# Allegro board MPRC-V7FPGA_PCBV12_20230526.brd
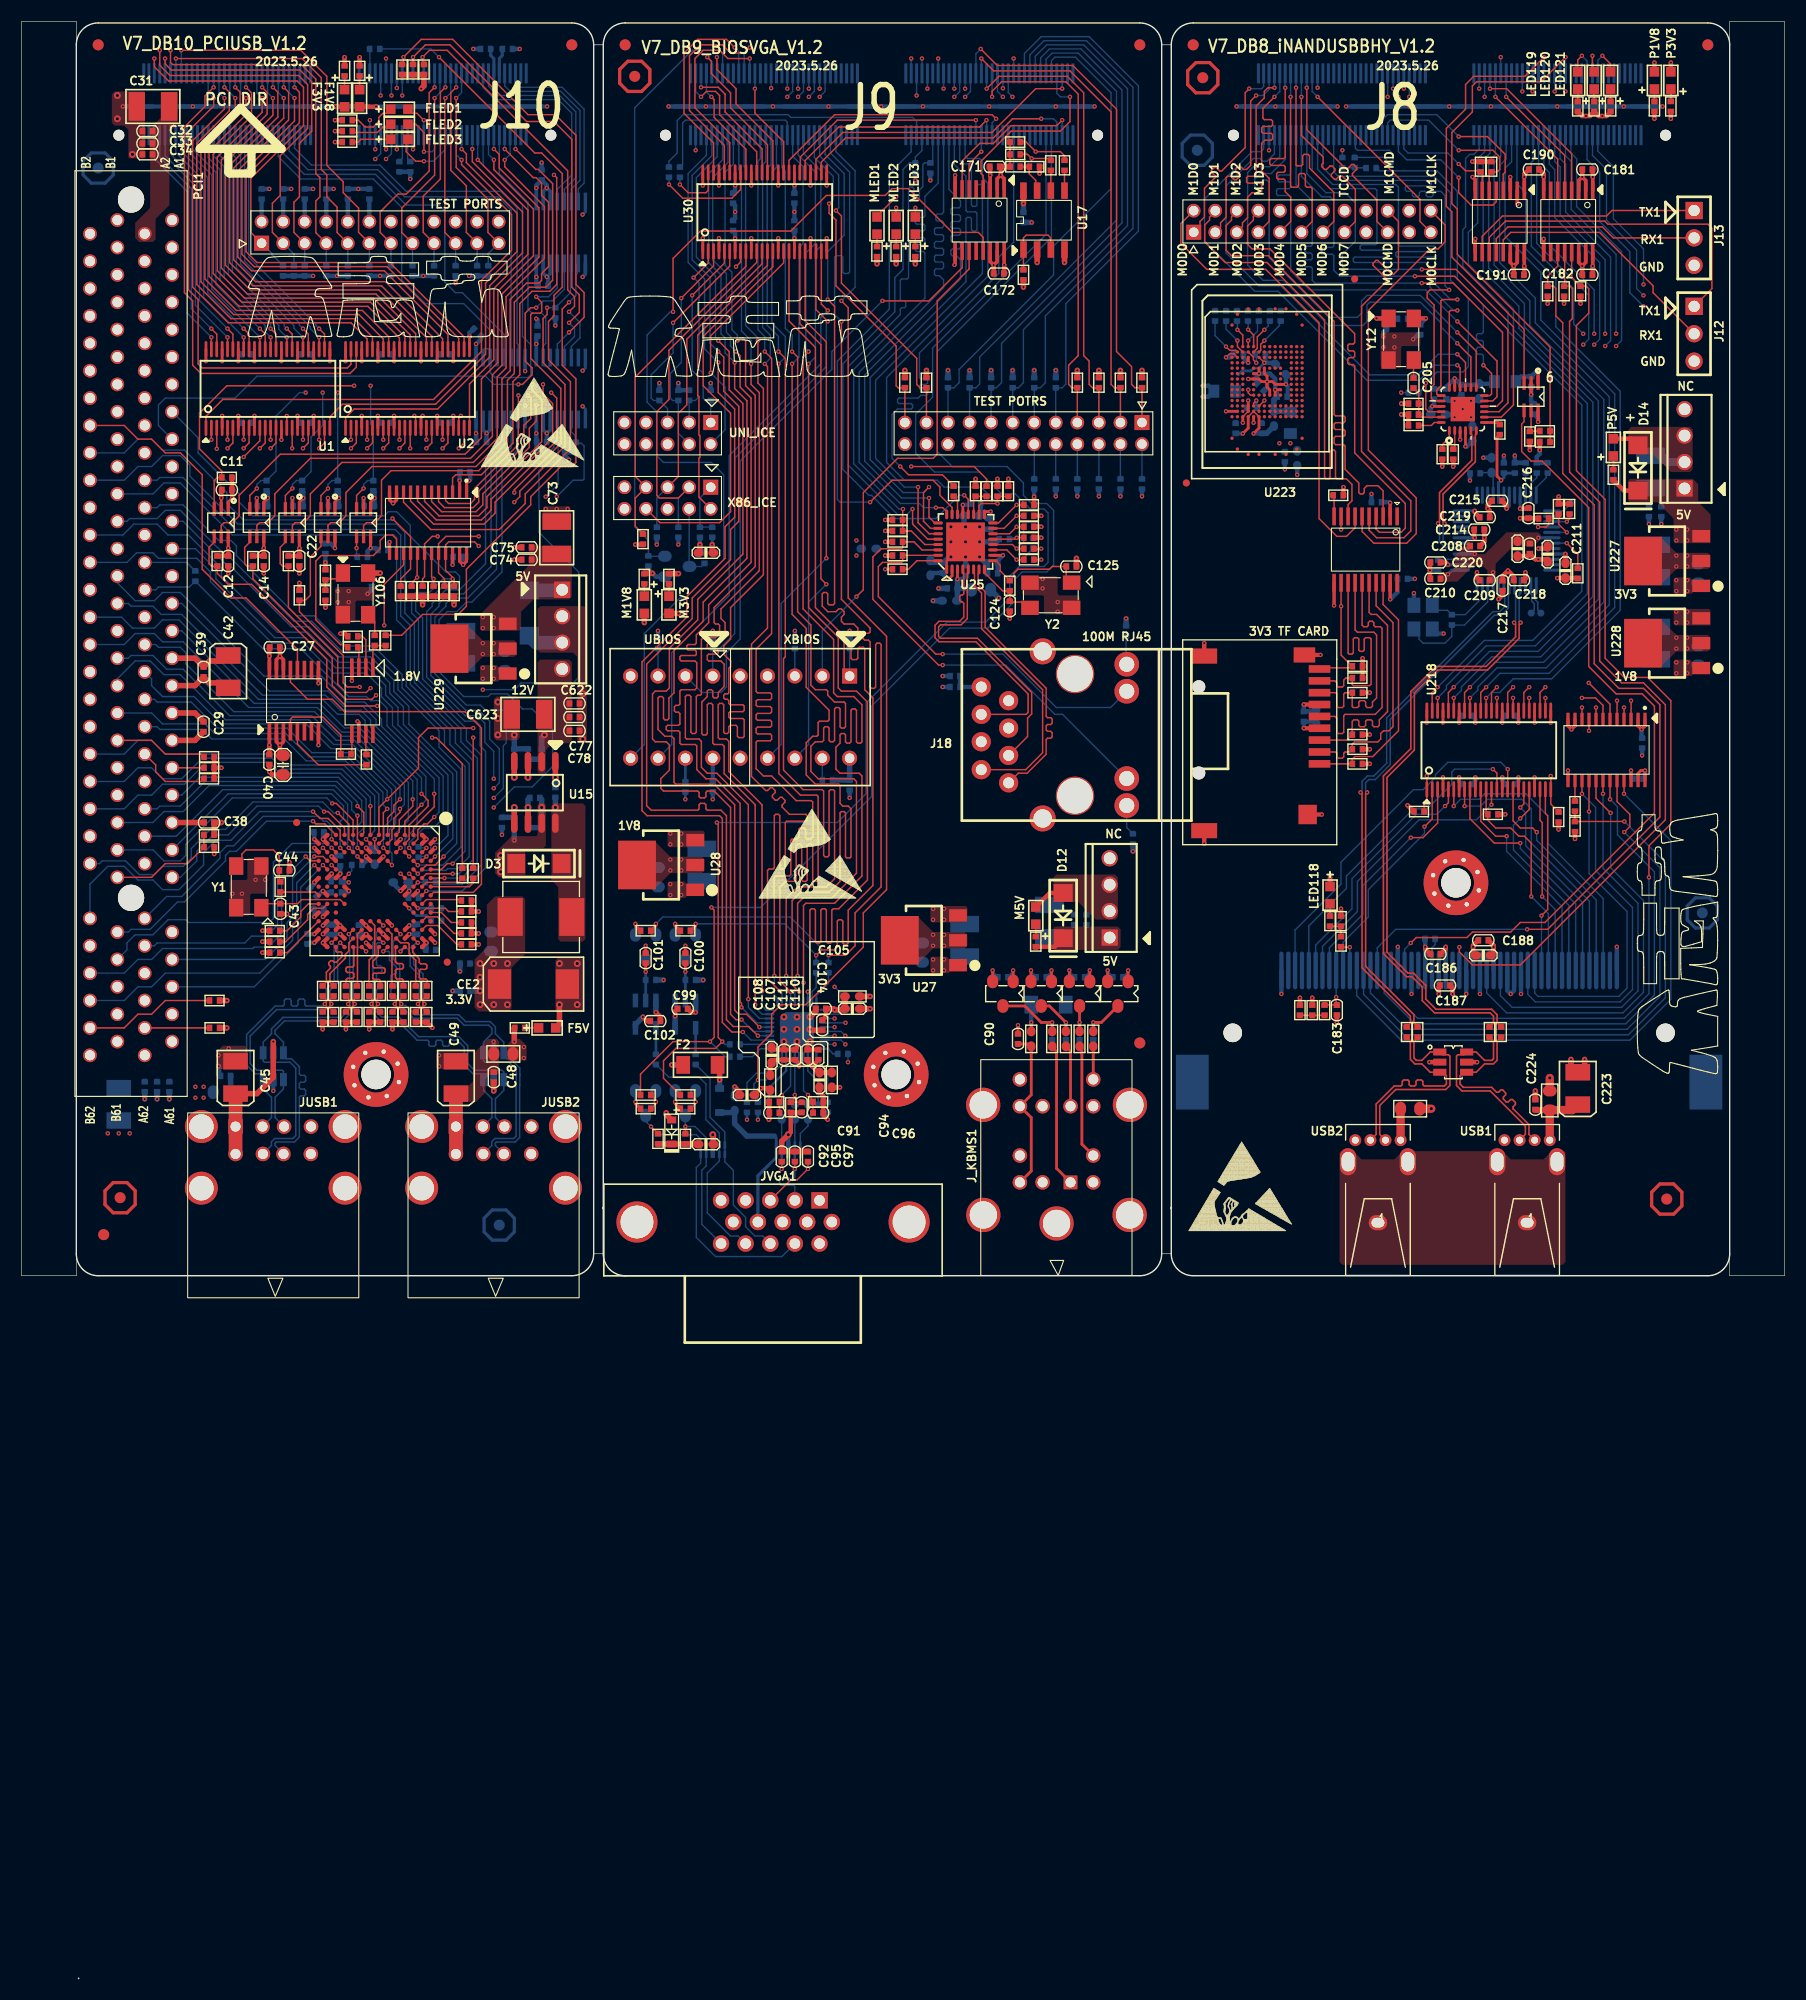
[diagram p0: board, top side]
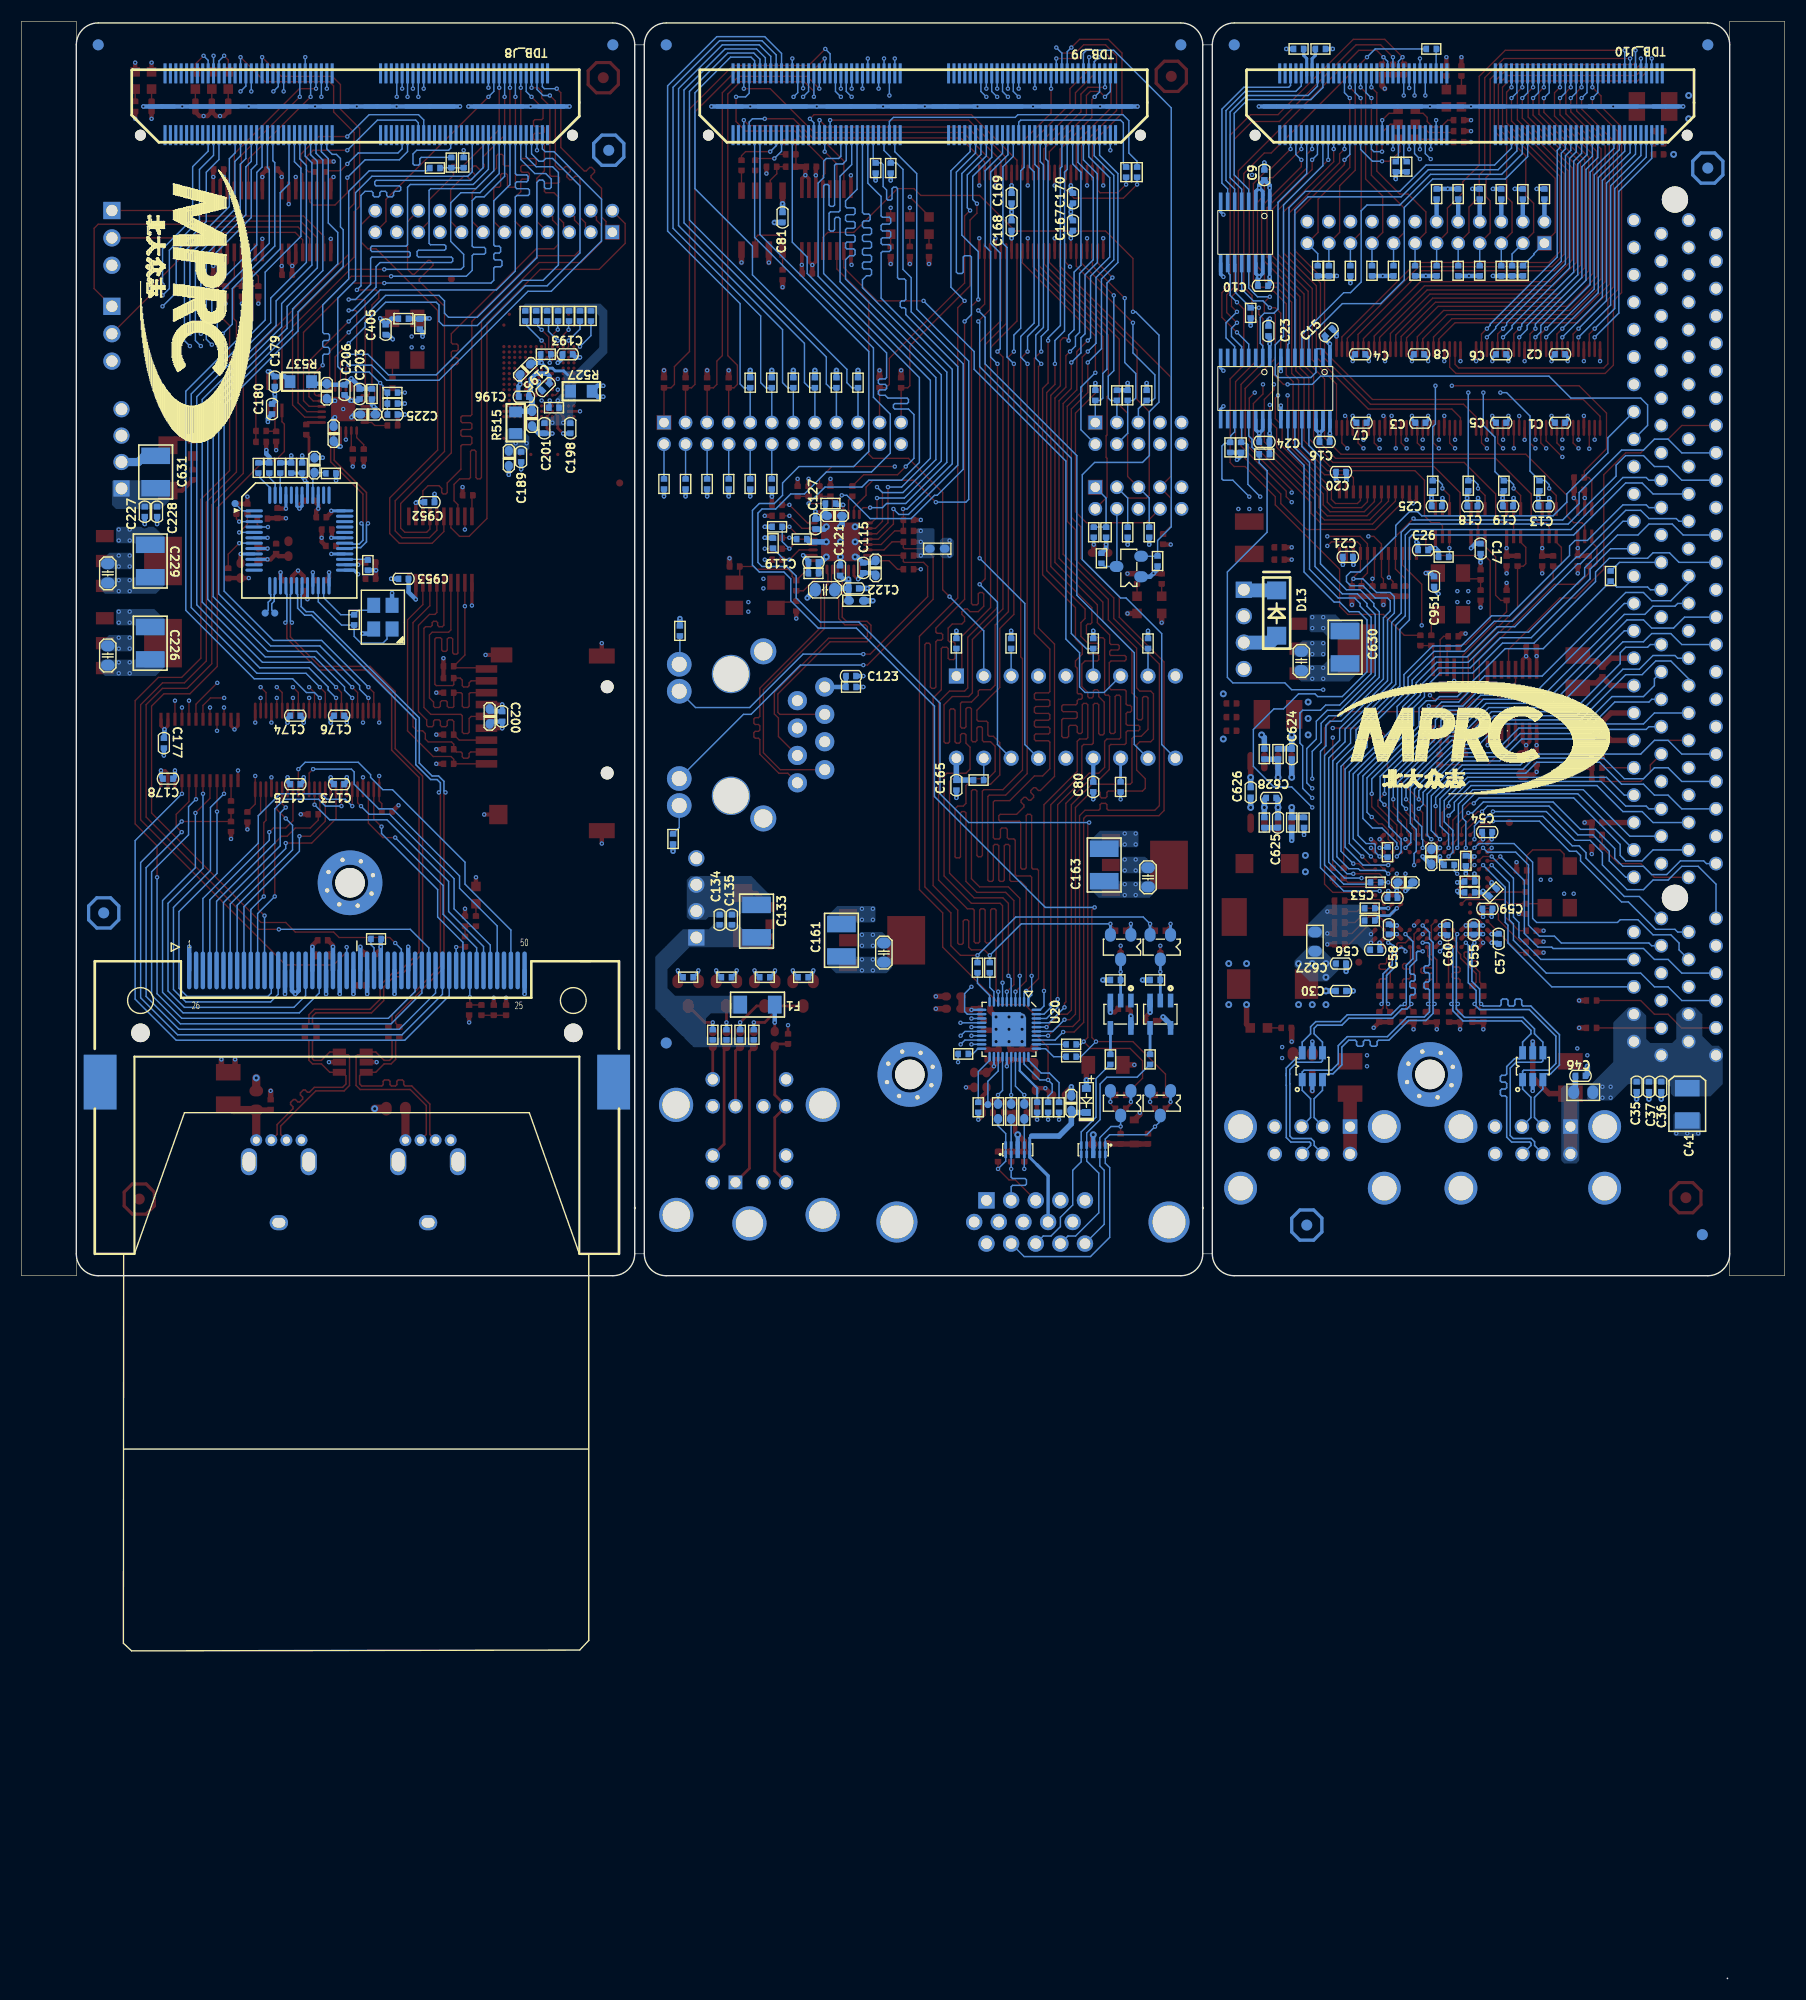
[diagram p1: board, bottom side, seen from below]

Outline 163.58 x 181.51 mm; copper layers: TOP, GND2, ART3, ART4, POWER5, BOTTOM. Coordinates in mm from the lower left corner of the outline.
Outline path: 5.29,0.01 5.29,0 ; 53.09,179.35 arc(52.49,180.79) 51.05,181.39 7.11,181.39 arc(5.68,180.79) 5.08,179.35 5.08,67.21 arc(5.68,65.78) 7.11,65.18 51.05,65.18 arc(52.49,65.78) 53.09,67.21 ; 53.09,179.35 53.09,67.21 ; 53.09,179.35 53.98,179.35 ; 53.09,67.21 53.98,67.21 ; 53.98,179.35 arc(54.57,180.79) 56.01,181.39 103.76,181.39 arc(105.2,180.79) 105.79,179.35 ; 53.98,179.35 53.98,71.4 53.98,71.53 53.98,67.21 ; 53.98,67.21 arc(54.57,65.78) 56.01,65.18 103.76,65.18 arc(105.2,65.78) 105.79,67.21 ; 105.79,179.35 105.79,67.21 ; 105.79,179.35 106.68,179.35 ; 105.79,67.21 106.68,67.21 ; 106.68,179.35 arc(107.28,180.79) 108.71,181.39 156.46,181.39 arc(157.9,180.79) 158.5,179.35 158.5,67.21 arc(157.9,65.78) 156.46,65.18 108.71,65.18 arc(107.28,65.78) 106.68,67.21 ; 106.68,179.35 106.68,71.4 106.68,71.53 106.68,67.21 ; 0,181.51 5.08,181.51 5.08,65.18 0,65.18 0,181.51 ; 158.5,181.51 163.58,181.51 163.58,65.18 158.5,65.18 158.5,181.51

## Design rules (mm)
net group 5VKBCLK: nets 5VKBCLK N125050820
net group 5VMSCLK: nets 5VMSCLK N125050832
net group 5VMSDATA: nets 5VMSDATA N125050826
net group BLUE: nets BLUE CHR_MB
net group BUSBD1: nets BUSBD1+ BUSBD1-
net group BUSBD2: nets BUSBD2+ BUSBD2-
net group BUSBD3: nets BUSBD3+ BUSBD3-
net group BUSBD4: nets BUSBD4+ BUSBD4-
net group BUSBD5: nets BUSBD5+ BUSBD5-
net group CHR_MG: nets CHR_MG GREEN
net group CHR_MR: nets CHR_MR RED
net group DE2CLK: nets DE2CLK N141402505
net group DE2HS: nets DE2HS N141364665
net group DE2VS: nets DE2VS N141364645
net group FE2USBD1-: nets FE2USBD1- USBDN1
net group FE2USBD2+: nets FE2USBD2+ USBDP2
net group FE2USBD2-: nets FE2USBD2- USBDN2
net group MACRXCLKI: nets MACRXCLKI R_RXC
net group MACTXCLKI: nets MACTXCLKI R_TXC
net group RSD1: nets RSDM1 RSDP1
net group RSD2: nets RSDM2 RSDP2
net group RSD3: nets RSDM3 RSDP3
net group RSD4: nets RSDM4 RSDP4
net group RSD5: nets RSDM5 RSDP5
net group USB_D: nets USB_DM USB_DP
net group USBD3: nets USBDN3 USBDP3
net group USBDP1: nets FE2USBD1+ USBDP1
net group DE: nets DE2B0 DE2B1 DE2B2 DE2B3 DE2B4 DE2B5 DE2B6 DE2B7 DE2G0 DE2G1 DE2G2 DE2G3 DE2G4 DE2G5 DE2G6 DE2G7 DE2R0 DE2R1 DE2R2 DE2R3 DE2R4 DE2R5 DE2R6 DE2R7
net group ETH: nets M_RD_N M_RD_P M_TD_N M_TD_P
net group RGMII: nets MACTXD0 MACTXD1 MACTXD2 MACTXD3 MACTXEN
net group USB: nets USBD0 USBD1 USBD2 USBD3 USBD4 USBD5 USBD6 USBD7 USBDIR USBNXT USBSTP
net group USBCLK: nets N73163395 N141462797 N141462849 USBCLK
nets with their own width: min track width 0.203; nets GND

## Placement (name value [footprint] x y rotation side)
C1  0.1uF  [C0402]  20.83 144.3 0 bottom
C2  0.1uF  [C0402]  20.83 150.65 0 bottom
C3  0.1uF  [C0402]  33.78 144.3 0 bottom
C4  0.1uF  [C0402]  39.37 150.65 0 bottom
C5  0.1uF  [C0402]  26.29 144.3 0 bottom
C6  0.1uF  [C0402]  26.29 150.65 0 bottom
C7  0.1uF  [C0402]  39.24 144.3 0 bottom
C8  0.1uF  [C0402]  33.91 150.65 0 bottom
C9  0.1uF  [C0402]  48.26 167.29 90 bottom
C10  0.1uF  [C0402]  48.39 157 0 bottom
C11  0.1uF  [C0402]  19.05 138.08 0 top
C12  0.1uF  [C0402]  19.18 131.48 270 top
C13  0.1uF  [C0402]  22.35 136.56 0 bottom
C14  0.1uF  [C0402]  22.48 131.48 270 top
C15  0.1uF  [C0402]  42.29 152.68 135 bottom
C16  0.1uF  [C0402]  42.67 142.52 0 bottom
C17  0.1uF  [C0402]  28.19 132.62 270 bottom
C18  0.1uF  [C0402]  28.96 136.56 0 bottom
C19  0.1uF  [C0402]  25.65 136.56 0 bottom
C20  0.1uF  [C0402]  41.15 139.73 180 bottom
C21  0.1uF  [C0402]  40.51 131.86 180 bottom
C22  0.1uF  [C0402]  25.78 131.48 270 top
C23  0.1uF  [C0402]  47.88 152.81 90 bottom
C24  0.1uF  [C0402]  48.26 142.52 0 bottom
C25  0.1uF  [C0402]  32.26 136.56 0 bottom
C26  0.1uF  [C0402]  33.53 132.49 0 bottom
C27  0.1uF  [C0402]  23.5 123.47 0 top
C28  22uF/6.3V  [C0805]  24.26 112.55 270 top
C29  0.1uF  [C0402]  16.89 116.11 90 top
C30  0.1uF  [C0402]  41.15 91.6 180 bottom
C31  22uF/25V  [1210-A]  12.19 173.64 180 top
C32  0.1uF  [C0402]  11.68 171.35 180 top
C33  0.1uF  [C0402]  11.68 170.21 180 top
C34  0.1uF  [C0402]  11.68 169.19 180 top
C35  0.1uF  [C0402]  13.72 82.71 270 bottom
C36  0.1uF  [C0402]  11.43 82.71 270 bottom
C37  0.1uF  [C0402]  12.57 82.71 270 bottom
C38  0.1uF  [C0402]  17.4 107.22 0 top
C39  0.1uF  [C0402]  16.89 121.19 270 top
C40  0.1uF  [C0402]  22.99 113.06 270 top
C41  100uF/10V  [BCAP]  9.02 82.58 270 bottom
C42  100uF/10V  [BCAP]  19.18 122.71 270 top
C43  22pF  [C0402]  24 99.22 270 top
C44  22pF  [C0402]  24.38 102.77 0 top
C45  100uF/10V  [BCAP]  19.86 82.07 90 top
C46  470pF  [C0402]  18.92 83.72 180 bottom
C48  470pF  [C0402]  43.82 83.6 270 top
C49  100uF/10V  [BCAP]  40.3 82.07 90 top
C51  10uF/6.3V  [C0603]  32.77 104.04 270 bottom
C52  4.7uF/6.3V  [C0603]  35.18 101.67 0 bottom
C53  0.1uF  [C0402]  36.37 100.23 180 bottom
C54  0.1uF  [C0402]  27.58 106.33 0 bottom
C55  0.1uF  [C0402]  28.83 97.29 90 bottom
C56  0.01uF  [C0402]  37.97 95.41 180 bottom
C57  0.1uF  [C0402]  26.52 96.42 270 bottom
C58  0.1uF  [C0402]  36.7 97.31 90 bottom
C59  0.1uF  [C0402]  27.56 99.22 180 bottom
C60  0.01uF  [C0402]  31.29 97.24 90 bottom
C73  22uF/25V  [1210-A]  49.66 133.63 270 top
C74  0.1uF  [C0402]  46.86 131.6 180 top
C75  0.1uF  [C0402]  46.86 132.75 180 top
C77  0.1uF  [C0402]  51.31 117 0 top
C78  0.1uF  [C0402]  51.31 115.73 0 top
C80  0.1uF  [C0402]  64.14 110.52 270 bottom
C81  0.1uF  [C0402]  92.96 163.35 90 bottom
C86  1uF/10V  [C0603]  63.5 132.24 0 top
C89  1uF/10V  [C0603]  67.31 81.95 180 top
C90  0.1uF  [C0402]  92.46 87.15 90 top
C91  10pF  [C0402]  69.85 80.29 180 top
C92  10pF  [C0402]  70.53 76.23 90 top
C93  1uF/10V  [C0603]  66.17 81.18 90 bottom
C94  10pF  [C0402]  72.39 80.8 270 top
C95  10pF  [C0402]  71.75 76.23 90 top
C96  10pF  [C0402]  73.91 80.29 0 top
C97  10pF  [C0402]  72.97 76.23 90 top
C98  10uF/6.3V  [C0603]  63.5 77.37 0 top
C99  0.1uF  [C0402]  61.34 89.95 180 top
C100  22pF  [C0402]  61.6 94.65 90 top
C101  22pF  [C0402]  57.91 94.65 90 top
C102  0.1uF  [C0402]  58.8 88.8 180 top
C103  10uF/6.3V  [C0603]  77.09 89.95 0 top
C104  0.1uF  [C0402]  74.3 88.42 270 top
C105  0.01uF  [C0402]  74.17 89.95 180 top
C106  10uF/6.3V  [C0603]  69.6 85.63 90 top
C107  0.1uF  [C0402]  71.78 85.68 90 top
C108  0.01uF  [C0402]  70.76 85.68 90 top
C109  10uF/6.3V  [C0603]  74.04 83.34 270 top
C110  0.1uF  [C0402]  73.94 85.68 90 top
C111  0.01uF  [C0402]  72.92 85.68 90 top
C114  4.7uF/6.3V  [C0603]  84.33 130.84 90 bottom
C115  0.1uF  [C0402]  85.47 130.84 90 bottom
C119  X_100pF  [C0402]  90.09 131.35 0 bottom
C120  22uF/6.3V  [C0805]  89.03 128.81 0 bottom
C121  0.1uF  [C0402]  87.63 130.59 270 bottom
C122  0.1uF  [C0402]  86.36 128.94 0 bottom
C123  0.1uF  [C0402]  86.61 120.81 180 bottom
C124  22pF  [C0402]  91.69 127.28 270 top
C125  22pF  [C0402]  97.41 130.97 0 top
C126  10uF/6.3V  [C0603]  88.14 135.67 0 bottom
C127  0.1uF  [C0402]  89.92 134.9 90 bottom
C133  22uF/25V  [1210-A]  95.38 98.07 270 bottom
C134  0.1uF  [C0402]  98.81 98.2 90 bottom
C135  0.1uF  [C0402]  97.66 98.2 90 bottom
C161  22uF/25V  [1210-A]  87.5 96.3 90 bottom
C162  22uF/6.3V  [C0805]  83.57 95.15 90 bottom
C163  22uF/25V  [1210-A]  63.12 103.28 90 bottom
C164  22uF/6.3V  [C0805]  59.05 102.14 90 bottom
C165  0.1uF  [C0402]  76.84 110.68 270 bottom
C167  0.1uF  [C0402]  66.02 162.59 90 bottom
C168  0.1uF  [C0402]  71.71 162.59 90 bottom
C169  0.1uF  [C0402]  71.71 165.13 270 bottom
C170  0.1uF  [C0402]  66.02 165.13 270 bottom
C171  0.1uF  [C0402]  90.3 168.05 180 top
C172  0.1uF  [C0402]  90.68 158.15 180 top
C173  0.1uF  [C0402]  134.11 110.77 0 bottom
C174  0.1uF  [C0402]  138.18 117.12 180 bottom
C175  0.1uF  [C0402]  138.18 110.77 180 bottom
C176  0.1uF  [C0402]  134.11 117.12 0 bottom
C177  0.1uF  [C0402]  150.37 114.58 270 bottom
C178  0.1uF  [C0402]  149.99 111.28 180 bottom
C179  0.1uF  [C0402]  140.08 148.11 90 bottom
C180  0.1uF  [C0402]  140.34 145.57 90 bottom
C181  0.1uF  [C0402]  145.29 167.8 180 top
C182  0.1uF  [C0402]  145.29 158.02 180 top
C183  X_0.047uF  [C0402]  122.05 89.82 90 top
C184  10uF/6.3V  [C0603]  135.64 94.9 0 top
C185  4.7uF/6.3V  [C0603]  118.36 141 270 bottom
C186  0.1uF  [C0402]  131.19 95.03 180 top
C187  0.1uF  [C0402]  132.08 92.11 180 top
C188  0.1uF  [C0402]  135.64 96.3 0 top
C189  0.01uF  [C0402]  117.22 141.13 270 bottom
C190  0.1uF  [C0402]  140.34 167.8 0 top
C191  0.1uF  [C0402]  138.94 158.02 180 top
C193  0.1uF  [C0402]  112.9 150.65 180 bottom
C194  10uF/6.3V  [C0603]  116.2 144.68 270 bottom
C195  0.1uF  [C0402]  114.94 147.6 135 bottom
C196  0.01uF  [C0402]  116.97 146.72 180 bottom
C197  10uF/6.3V  [C0603]  116.84 149.26 315 bottom
C198  0.1uF  [C0402]  112.65 143.79 90 bottom
C199  10uF/6.3V  [C0603]  120.14 117.06 90 bottom
C200  0.1uF  [C0402]  118.98 117.06 270 bottom
C201  0.01uF  [C0402]  115.06 143.79 90 bottom
C202  2.2uF/6.3V  [C0603]  131.44 145.06 180 bottom
C203  0.1uF  [C0402]  132.21 146.97 90 bottom
C204  2.2uF/6.3V  [C0603]  134.62 143.29 90 bottom
C205  0.1uF  [C0402]  129.16 147.99 270 top
C206  0.1uF  [C0402]  133.6 147.35 270 bottom
C207  10uF/6.3V  [C0603]  135.25 147.22 270 bottom
C208  0.1uF  [C0402]  134.87 132.87 0 top
C209  0.1uF  [C0402]  135.76 129.7 180 top
C210  0.1uF  [C0402]  131.19 129.82 180 top
C211  0.1uF  [C0402]  139.95 132.62 270 top
C212  1uF/10V  [C0603]  141.6 132.11 270 top
C213  10uF/6.3V  [C0603]  138.81 132.62 270 top
C214  0.1uF  [C0402]  135.25 134.4 0 top
C215  0.1uF  [C0402]  136.91 137.06 180 top
C216  0.1uF  [C0402]  139.83 135.92 270 top
C217  0.1uF  [C0402]  137.41 129.19 90 top
C218  0.1uF  [C0402]  138.94 129.7 180 top
C219  0.1uF  [C0402]  135.76 135.54 0 top
C220  0.1uF  [C0402]  131.19 131.35 180 top
C221  10uF/6.3V  [C0603]  143.26 130.59 270 top
C222  1uF/10V  [C0603]  136.4 140.37 90 bottom
C223  100uF/10V  [BCAP]  144.4 81.06 90 top
C224  470pF  [C0402]  140.46 81.06 90 top
C225  0.1uF  [C0402]  129.16 145.06 180 bottom
C226  22uF/25V  [1210-A]  151.64 123.86 90 bottom
C227  0.1uF  [C0402]  152.15 136.05 270 bottom
C228  0.1uF  [C0402]  151 136.05 270 bottom
C229  22uF/25V  [1210-A]  151.64 131.48 90 bottom
C230  22uF/6.3V  [C0805]  155.58 130.33 90 bottom
C232  22uF/6.3V  [C0805]  155.58 122.71 90 bottom
C405  0.1uF  [C0402]  129.79 152.94 270 bottom
C622  0.1uF  [C0402]  51.31 118.27 180 top
C623  22uF/25V  [1210-A]  46.99 117.25 180 top
C624  0.1uF  [C0402]  45.72 113.57 270 bottom
C625  1nF  [C0402]  46.99 107.22 270 bottom
C626  0.1uF  [C0402]  49.53 110.01 270 bottom
C627  0.1uF  [C0402]  41.15 94.14 180 bottom
C628  22pF  [C0402]  47.62 109.5 0 bottom
C629  22uF/6.3V  [C0805]  44.83 122.2 90 bottom
C630  22uF/25V  [1210-A]  40.77 123.47 270 bottom
C631  22uF/25V  [1210-A]  151.13 139.73 270 bottom
C951  0.1uF  [C0402]  32.51 129.57 270 bottom
C952  0.1uF  [C0402]  125.73 136.94 180 bottom
C953  0.1uF  [C0402]  128.14 129.82 0 bottom
CE2  330uF/6.3V  [DCAP]  47.5 92.23 180 top
CF1  CF Short-arm  [CFCMD_7E50_3M]  132.46 93.5 180 bottom
D3  B340A-SMA  [SMA]  48.01 103.41 0 top
D4  IN5819  [D67X49H50]  64.77 81.44 270 bottom
D5  IN5819  [D67X49H50]  60.33 78.52 270 top
D12  SMAJ5.0A  [SMA]  96.65 98.58 270 top
D13  SMAJ5.0A  [SMA]  47.12 126.65 90 bottom
D14  SMAJ5.0A  [SMA]  149.99 140.11 270 top
F1  1.5A/6V  [1206-A]  95.29 90.33 0 bottom
F1V8  GREEN  [LED0603]  31.37 174.4 270 top
F2  1.5A/6V  [1206-A]  62.99 84.74 0 top
F3V3  GREEN  [LED0603]  29.97 174.4 270 top
F5V  GREEN  [LED0603]  48.77 88.17 0 top
FB1  220 Ohm@100MHz  [L0805]  18.67 82.2 0 bottom
FB2  220 Ohm@100MHz  [L0805]  44.7 85.76 180 top
FB3  220 Ohm@100MHz  [L0805]  43.56 96.17 90 bottom
FB4  220 Ohm@100MHz  [L0603]  93.69 87.15 270 top
FB5  220 Ohm@100MHz  [L0603]  95.63 87.15 270 top
FB6  220 Ohm@100MHz  [L0603]  98.17 87.15 270 top
FB7  220 Ohm@100MHz  [L0603]  96.9 87.15 270 top
FB8  220 Ohm@100MHz  [L0603]  99.44 87.15 270 top
FB9  75 Ohm@100MHz  [L0603]  70.53 80.42 270 bottom
FB10  75 Ohm@100MHz  [L0603]  71.75 80.42 270 bottom
FB11  75 Ohm@100MHz  [L0603]  72.97 80.42 270 bottom
FB12  220 Ohm@100MHz  [L0603]  77.09 91.09 0 top
FB13  220 Ohm@100MHz  [L0603]  69.47 83.09 270 top
FB14  220 Ohm@100MHz  [L0603]  75.18 83.34 270 top
FB15  220 Ohm@100MHz  [L0603]  86.11 127.79 0 bottom
FB16  220 Ohm@100MHz  [L0603]  78.61 132.62 0 bottom
FB32  220 Ohm@100MHz  [L0805]  128.85 80.68 180 top
FB33  220 Ohm@100MHz  [L0805]  141.8 81.44 270 top
FLED1  GREEN  [LED0603]  35.05 173.39 0 top
FLED2  GREEN  [LED0603]  35.05 171.99 0 top
FLED3  GREEN  [LED0603]  35.05 170.59 0 top
H1  -  [TLC240D108]  81.15 83.85 0 top
H2  -  [TLC240D108]  32.89 83.85 0 top
H3  -  [TLC240D108]  133.1 101.63 0 top
J1  CN HEADER 4X1 PC POWER  [SIP4_2N45]  50.17 128.81 0 top
J5  CH 12X2 P2.0mm  [2X12_P2MM]  33.27 161.96 90 top
J6  SPI FLASH SOCKET  [DIP_FLASH_NARROWSOCKET]  66.67 117 270 top
J7  CN HEADER 5X2 P2.0mm  [2X5_2MM]  59.94 143.32 270 top
J8  CN HEADER 5X2 P2.0mm  [2X5_2MM]  59.94 137.32 270 top
J9  CH 12X2 P2.0mm  [2X12_P2MM]  92.96 143.32 270 top
J11  CN HEADER 4X1 PC POWER  [SIP4_2N45]  100.97 96.55 180 top
J12  CN HEADER 3X1 P2.5mm  [J1X3L100P]  155.19 155.1 270 top
J13  CN HEADER 3X1 P2.5mm  [J1X3L100P]  155.19 163.99 270 top
J14  TF CARD  [TFCARD]  122.14 124.16 270 top
J15  CN HEADER 4X1 PC POWER  [SIP4_2N45]  154.31 138.21 180 top
J16  CH 12X2 P2.0mm  [2X12_P2MM]  119.76 162.97 90 top
J18  HR911105A  [RJ45_HR911105A]  87.25 115.35 90 top
J_KBMS1  KBMS 17P  [PS2_X]  97.33 73.84 270 top
JUSB1  USBAFDRD-SQBL5N0/DIP-8P  [USB]  19.86 79.02 90 top
JUSB2  USBAFDRD-SQBL5N0/DIP-8P  [USB]  40.3 79.02 90 top
JVGA1  DB15  [VGA_S]  74.04 72.17 180 top
L2  4.7uH/7066  [SML2525]  51.05 98.46 270 top
LED118  GREEN  [LED0603]  121.41 100.49 270 top
LED119  GREEN  [LED0603]  144.4 176.05 90 top
LED120  GREEN  [LED0603]  145.92 176.05 90 top
LED121  GREEN  [LED0603]  147.45 176.05 90 top
M1V8  GREEN  [LED0603]  57.79 127.41 270 top
M3V3  GREEN  [LED0603]  60.07 127.41 270 top
M5V  GREEN  [LED0603]  94.11 98.58 90 top
M7  MARK  [SMTMARK]  51.05 179.35 180 bottom
M8  MARK  [SMTMARK]  51.05 179.35 0 top
M9  MARK  [SMTMARK]  56.01 179.35 180 bottom
M10  MARK  [SMTMARK]  7.11 179.35 180 bottom
M11  MARK  [SMTMARK]  56.01 179.35 0 top
M12  MARK  [SMTMARK]  7.11 179.35 0 top
M13  MARK  [SMTMARK]  103.76 179.35 0 top
M14  MARK  [SMTMARK]  9.14 72.42 0 top
M15  MARK  [SMTMARK]  103.76 179.35 180 bottom
M16  MARK  [SMTMARK]  7.11 167.92 180 bottom
M17  MARK  [SMTMARK]  56.9 176.43 0 top
M18  MARK  [SMTMARK]  44.32 69.88 180 bottom
M*  MARK  [unnamed]  103.76 86.77 0 top
MLED1  GREEN  [LED0603]  79.38 162.59 90 top
MLED2  GREEN  [LED0603]  81.15 162.59 90 top
MLED3  GREEN  [LED0603]  82.93 162.59 90 top
MS1  FMARK  [TESTPAD_C26]  25.53 107.22 0 top
MS2  FMARK  [TESTPAD_C26]  39.5 94.26 0 top
MS3  FMARK  [TESTPAD_C26]  123.7 157.64 0 top
MS4  FMARK  [TESTPAD_C26]  108.08 138.71 0 top
NOREF  -  [unnamed]  7.62 68.99 0 top
NOREF#2  -  [#2]  5.08 65.18 0 top
NOREF#3  MARK  [unnamed]  156.46 179.35 0 top
NOREF#4  MARK  [unnamed]  108.71 179.35 0 top
NOREF#5  #VAL  [#2]  199.14 89.31 0 top
NOREF#6  MARK  [unnamed]  109.6 176.31 0 top
NOREF#7  MARK  [unnamed]  152.65 72.29 0 top
NOREF#8  #VAL  [#2]  30.35 114.97 180 bottom
NOREF#9  MARK  [unnamed]  155.96 98.84 180 bottom
NOREF#10  MARK  [unnamed]  156.46 179.35 180 bottom
NOREF#11  #VAL  [#2]  147.45 156.62 270 bottom
NOREF#12  -  [unnamed]  7.62 68.99 180 bottom
NOREF#13  MARK  [unnamed]  109.09 169.58 180 bottom
NOREF#14  MARK  [unnamed]  103.76 86.77 180 bottom
NOREF#15  MARK  [unnamed]  108.71 179.35 180 bottom
P1V8  GREEN  [LED0603]  151.51 176.05 90 top
P3V3  GREEN  [LED0603]  153.03 176.05 90 top
P5V  GREEN  [LED0603]  147.7 142.02 90 top
PCI1  PCI-32AB_1  [PCI_AB]  13.97 163.1 270 top
Q1  SN74AVC1T45DCK-SC70  [DCK_6P]  19.18 136.3 270 top
Q2  SN74AVC1T45DCK-SC70  [DCK_6P]  22.48 136.3 270 top
Q3  SN74AVC1T45DCK-SC70  [DCK_6P]  29.08 136.3 270 top
Q4  SN74AVC1T45DCK-SC70  [DCK_6P]  25.78 136.3 270 top
Q5  SN74AVC1T45DCK-SC70  [DCK_6P]  32.38 136.3 270 top
Q7  BSS138LT1G  [SOT23_GSD]  101.73 91.34 270 top
Q8  BSS138LT1G  [SOT23_GSD]  98.17 91.34 270 top
Q9  BSS138LT1G  [SOT23_GSD]  94.62 91.34 270 top
Q10  BSS138LT1G  [SOT23_GSD]  91.06 91.34 270 top
Q11  BSS138LT1G  [SOT23_GSD]  61.6 95.66 270 bottom
Q12  BSS138LT1G  [SOT23_GSD]  61.6 81.18 270 bottom
Q13  BSS138LT1G  [SOT23_GSD]  57.91 81.18 270 bottom
Q14  BSS138LT1G  [SOT23_GSD]  57.91 95.66 270 bottom
Q15  BSS138LT1G  [SOT23_GSD]  60.83 130.97 0 bottom
Q16  SN74AVC1T45DCK-SC70  [DCK_6P]  140.72 147.99 270 top
R1  4.7K  [R0402]  18.16 131.48 270 top
R2  4.7K  [R0402]  21.46 131.48 270 top
R3  4.7K  [R0402]  48.26 141.38 0 bottom
R4  4.7K  [R0402]  25.78 128.3 270 top
R5  4.7K  [R0402]  51.44 142.02 90 bottom
R6  4.7K  [R0402]  24.77 131.48 270 top
R7  4.7K  [R0402]  31.62 131.86 180 bottom
R8  4.7K  [R0402]  50.42 142.02 90 bottom
R9  4.7K  [R0402]  36.2 128.68 90 top
R10  4.7K  [R0402]  35.18 128.68 90 top
R11  4.7K  [R0402]  40.13 128.68 90 top
R12  4.7K  [R0402]  39.24 128.68 90 top
R13  4.7K  [R0402]  38.23 128.68 90 top
R14  4.7K  [R0402]  37.21 128.68 90 top
R15  4.7K  [R0402]  49.53 154.49 90 bottom
R16  33  [R0402]  32.77 124.11 270 top
R17  10K  [R0402]  30.73 124.49 0 top
R18  33  [R0402]  32 113.06 270 top
R19  33  [R0402]  30.73 123.47 0 top
R20  33  [R0402]  30.1 113.57 0 top
R21  33  [R0402]  16.13 130.08 90 bottom
R22  10K  [R0402]  17.91 90.71 0 top
R23  10K  [R0402]  17.91 88.17 0 top
R24  10K  [R0402]  17.4 113.31 0 top
R25  10K  [R0402]  17.4 112.3 0 top
R26  10K  [R0402]  17.4 111.28 0 top
R27  X_10K  [R0402]  17.4 104.93 0 top
R28  10K  [R0402]  17.4 106.08 0 top
R29  10K  [R0402]  41.28 95.92 0 top
R30  10K  [R0402]  41.28 96.93 0 top
R31  10K  [R0402]  41.28 98.96 0 top
R32  10K  [R0402]  41.28 97.95 0 top
R33  10K  [R0402]  41.28 99.98 0 top
R34  9.1K  [R0402]  23.5 95.15 0 top
R35  1.5K  [R0402]  23.5 96.17 0 top
R36  1.5K  [R0402]  23.5 97.19 0 top
R37  1.5K  [R0402]  38.48 99.27 0 bottom
R38  4.7K  [R0402]  38.48 98.13 0 bottom
R39  1.5K  [R0402]  29.21 100.74 0 bottom
R40  0  [R0402]  37.94 101.67 180 bottom
R41  0  [R0402]  40.89 102.52 270 top
R42  0  [R0402]  41.91 102.52 270 top
R43  4.7K  [R0402]  31.11 103.28 180 bottom
R44  36 1%  [R0402]  24 101.25 270 top
R45  1.5K  [R0402]  29.57 103.67 270 bottom
R46  1.5K  [R0402]  27.05 100.74 135 bottom
R47  1.5K  [R0402]  29.21 101.76 180 bottom
R48  33  [R0402]  36.83 104.48 90 bottom
R49  36 1%  [R0402]  28.96 91.6 90 top
R50  15K  [R0402]  28.96 89.18 90 top
R51  36 1%  [R0402]  27.94 91.6 90 top
R52  15K  [R0402]  27.94 89.18 90 top
R53  36 1%  [R0402]  31.11 91.6 90 top
R54  15K  [R0402]  31.11 89.18 90 top
R55  36 1%  [R0402]  30.1 91.6 90 top
R56  15K  [R0402]  30.1 89.18 90 top
R57  36 1%  [R0402]  33.27 91.6 90 top
R58  15K  [R0402]  33.27 89.18 90 top
R59  36 1%  [R0402]  32.26 91.6 90 top
R60  15K  [R0402]  32.26 89.18 90 top
R61  36 1%  [R0402]  35.43 91.6 90 top
R62  15K  [R0402]  35.43 89.18 90 top
R63  36 1%  [R0402]  34.42 91.6 90 top
R64  15K  [R0402]  34.42 89.18 90 top
R65  36 1%  [R0402]  37.59 91.6 90 top
R66  15K  [R0402]  37.59 89.18 90 top
R67  36 1%  [R0402]  36.58 91.6 90 top
R68  15K  [R0402]  36.58 89.18 90 top
R69  33  [R0402]  32.77 178.97 180 bottom
R70  4.7K  [R0402]  35.05 168.05 90 bottom
R71  4.7K  [R0402]  36.07 168.05 90 bottom
R72  4.7K  [R0402]  43.05 178.97 0 bottom
R73  4.7K  [R0402]  45.09 178.97 180 bottom
R77  10K  [R0402]  48.26 113.57 90 bottom
R78  3.48K 1%  [R0402]  46.99 113.57 270 bottom
R81  300  [R0402]  46.23 88.17 0 top
R82  300  [R0402]  29.97 176.94 270 top
R83  300  [R0402]  31.37 176.94 270 top
R125  4.7K  [R0402]  29.34 138.46 90 bottom
R197  4.7K  [R0402]  26.04 138.46 90 bottom
R200  4.7K  [R0402]  19.05 139.22 180 top
R201  4.7K  [R0402]  22.73 138.46 90 bottom
R202  4.7K  [R0402]  36.32 177.07 90 top
R203  4.7K  [R0402]  37.34 177.07 90 top
R207  4.7K  [R0402]  32.64 138.46 90 bottom
R208  4.7K  [R0402]  35.31 177.07 90 top
R209  300  [R0402]  30.23 172.37 0 top
R210  300  [R0402]  30.23 171.35 0 top
R211  300  [R0402]  30.23 170.34 0 top
R321  10K  [R0402]  24.26 158.4 90 bottom
R322  1K  [R0402]  22.27 165.51 90 bottom
R323  10K  [R0402]  25.27 158.4 90 bottom
R324  10K  [R0402]  26.27 158.4 90 bottom
R325  10K  [R0402]  28.28 158.4 90 bottom
R326  10K  [R0402]  30.27 158.4 90 bottom
R327  10K  [R0402]  32.27 158.4 90 bottom
R328  10K  [R0402]  34.27 158.4 90 bottom
R329  10K  [R0402]  36.27 158.4 90 bottom
R330  10K  [R0402]  38.27 158.4 90 bottom
R331  10K  [R0402]  40.27 158.4 90 bottom
R332  10K  [R0402]  42.27 158.4 90 bottom
R333  10K  [R0402]  43.31 158.4 90 bottom
R334  1K  [R0402]  24.27 165.51 90 bottom
R335  1K  [R0402]  26.27 165.51 90 bottom
R336  1K  [R0402]  28.28 165.51 90 bottom
R337  1K  [R0402]  30.27 165.51 90 bottom
R338  1K  [R0402]  32.27 165.51 90 bottom
R339  4.7K  [R0402]  76.84 123.83 270 bottom
R340  4.7K  [R0402]  71.76 123.83 270 bottom
R341  4.7K  [R0402]  74.78 111.16 180 bottom
R343  4.7K  [R0402]  92.96 158.02 270 top
R344  X_4.7K  [R0402]  92.2 168.05 0 top
R345  4.7K  [R0402]  93.98 168.05 180 top
R346  0  [R0402]  95.5 168.18 90 top
R347  0  [R0402]  96.77 168.18 90 top
R348  4.7K  [R0402]  64.09 134.14 270 bottom
R349  X_4.7K  [R0402]  62.94 134.14 270 bottom
R350  4.7K  [R0402]  60.94 134.14 270 bottom
R351  4.7K  [R0402]  58.94 134.14 270 bottom
R352  4.7K  [R0402]  57.66 133.51 270 top
R353  4.7K  [R0402]  63.94 146.84 90 bottom
R354  4.7K  [R0402]  60.94 146.84 90 bottom
R355  4.7K  [R0402]  59.18 146.84 90 bottom
R356  4.7K  [R0402]  61.94 146.84 90 bottom
R357  2.2K  [R0402]  101.73 92.87 0 bottom
R358  2.2K  [R0402]  99.44 87.53 270 bottom
R359  2.2K  [R0402]  98.17 92.87 0 bottom
R360  2.2K  [R0402]  98.17 87.53 270 bottom
R361  2.2K  [R0402]  94.62 92.87 0 bottom
R362  2.2K  [R0402]  96.9 87.53 270 bottom
R363  2.2K  [R0402]  91.06 92.87 0 bottom
R364  2.2K  [R0402]  95.63 87.53 270 bottom
R365  33  [R0402]  73.73 93.76 90 bottom
R366  33  [R0402]  74.88 93.76 90 bottom
R367  33  [R0402]  66.19 86.64 0 bottom
R368  33  [R0402]  66.19 85.5 0 bottom
R369  X_4.7K  [R0402]  67.31 80.8 90 bottom
R370  4.7K  [R0402]  68.33 80.8 90 bottom
R371  1.2K 1%  [R0402]  69.34 80.8 90 bottom
R372  4.7K  [R0402]  74.8 80.8 270 bottom
R373  75  [R0402]  69.85 81.31 0 top
R374  75  [R0402]  71.37 80.8 90 top
R375  75  [R0402]  73.91 81.31 180 top
R376  4.7K  [R0402]  61.6 80.68 0 top
R377  4.7K  [R0402]  61.6 77.88 90 top
R378  4.7K  [R0402]  59.05 77.88 90 top
R379  2.2K  [R0402]  61.6 97.19 0 top
R380  2.2K  [R0402]  62.08 92.61 180 bottom
R381  2.2K  [R0402]  58.39 92.61 180 bottom
R382  0  [R0402]  61.6 81.95 0 top
R383  33  [R0402]  62.54 85.25 90 bottom
R384  4.7K  [R0402]  57.91 80.68 0 top
R385  2.2K  [R0402]  57.91 97.19 0 top
R386  0  [R0402]  57.91 81.95 0 top
R387  33  [R0402]  58.86 85.25 90 bottom
R396  4.7K  [R0402]  88.52 136.81 180 bottom
R397  6.49K 1%  [R0402]  90.09 130.33 0 bottom
R398  4.7K  [R0402]  93.85 133.13 90 bottom
R400  4.7K  [R0402]  93.47 135.67 0 top
R402  4.7K  [R0402]  93.47 134.65 0 top
R404  4.7K  [R0402]  93.47 133.63 180 top
R405  X_4.7K  [R0402]  91.19 133.51 180 bottom
R407  4.7K  [R0402]  81.28 131.98 0 top
R408  4.7K  [R0402]  81.28 133.25 0 top
R410  X_4.7K  [R0402]  90.55 137.95 270 top
R411  4.7K  [R0402]  91.57 137.95 90 top
R413  X_4.7K  [R0402]  81.28 134.27 0 top
R414  4.7K  [R0402]  81.28 135.29 180 top
R415  0  [R0402]  86.61 119.79 180 bottom
R416  X_1M  [R0402]  91.69 129.19 90 top
R418  4.7K  [R0402]  84.33 167.92 270 bottom
R420  4.7K  [R0402]  82.93 167.92 270 bottom
R421  33  [R0402]  89.53 137.95 90 top
R422  4.7K  [R0402]  93.47 136.68 0 top
R423  33  [R0402]  86.49 137.95 90 top
R424  4.7K  [R0402]  88.52 137.95 90 top
R425  33  [R0402]  93.47 132.62 0 top
R426  33  [R0402]  93.47 131.6 0 top
R432  0  [R0402]  81.28 130.71 180 top
R433  33  [R0402]  61.09 167.54 270 bottom
R435  10K  [R0402]  103.96 148.02 270 top
R436  1K  [R0402]  103.96 138.62 270 bottom
R437  10K  [R0402]  101.96 148.02 270 top
R438  1K  [R0402]  101.96 138.62 270 bottom
R439  10K  [R0402]  99.96 148.02 270 top
R440  1K  [R0402]  99.96 138.62 270 bottom
R441  10K  [R0402]  97.96 148.02 270 top
R442  1K  [R0402]  97.96 138.62 270 bottom
R443  10K  [R0402]  95.96 148.02 270 bottom
R444  1K  [R0402]  95.96 138.62 270 bottom
R445  10K  [R0402]  93.96 148.02 270 bottom
R446  1K  [R0402]  93.96 138.62 270 bottom
R447  10K  [R0402]  91.96 148.02 270 bottom
R448  10K  [R0402]  89.96 148.02 270 bottom
R449  10K  [R0402]  87.97 148.02 270 bottom
R450  33  [R0402]  60.07 167.54 270 bottom
R452  10K  [R0402]  85.96 148.02 270 bottom
R453  10K  [R0402]  83.96 148.02 270 top
R455  10K  [R0402]  81.96 148.02 270 top
R457  300  [R0402]  79.38 160.18 90 top
R458  300  [R0402]  81.15 160.18 90 top
R459  300  [R0402]  82.93 160.18 90 top
R460  4.7K  [R0402]  61.6 110.52 90 bottom
R461  4.7K  [R0402]  59.05 123.83 270 bottom
R462  4.7K  [R0402]  64.14 123.83 270 bottom
R463  33  [R0402]  76.2 85.76 0 bottom
R464  2.2K  [R0402]  63.37 131.73 90 bottom
R465  2.2K  [R0402]  58.17 131.48 270 bottom
R466  300  [R0402]  94.11 96.17 90 top
R467  300  [R0402]  60.07 129.82 270 top
R468  300  [R0402]  57.79 129.82 270 top
R469  4.7K  [R0402]  93.47 134.65 180 bottom
R470  4.7K  [R0402]  139.95 143.03 270 top
R471  X_0  [R0402]  141.35 143.54 0 top
R472  4.7K  [R0402]  143.13 156.49 90 top
R473  4.7K  [R0402]  141.6 156.49 90 top
R474  4.7K  [R0402]  136.53 107.98 180 top
R475  4.7K  [R0402]  144.65 156.49 90 top
R476  0  [R0402]  130.68 96.42 0 bottom
R477  4.7K  [R0402]  144.14 106.84 90 top
R478  68 1%  [R0402]  144.14 108.74 90 top
R479  10K  [R0402]  119.76 89.82 270 top
R480  68 1%  [R0402]  120.9 89.82 90 top
R481  X_10K  [R0402]  118.62 89.82 270 top
R482  300  [R0402]  121.41 98.07 90 top
R483  10K  [R0402]  122.43 98.07 90 top
R484  68 1%  [R0402]  122.43 96.17 270 top
R487  4.7K  [R0402]  135.38 168.05 270 top
R505  10K  [R0402]  114.17 145.7 0 bottom
R506  10K  [R0402]  116.84 154.21 270 bottom
R507  10K  [R0402]  115.82 154.21 270 bottom
R508  10K  [R0402]  114.94 150.65 180 bottom
R509  10K  [R0402]  111.76 154.21 270 bottom
R510  10K  [R0402]  110.74 154.21 270 bottom
R511  10K  [R0402]  113.79 154.21 270 bottom
R512  10K  [R0402]  114.81 154.21 270 bottom
R513  10K  [R0402]  112.78 154.21 270 bottom
R514  33  [R0402]  129.16 147.1 180 bottom
R515  0 R0805  [R0805]  117.73 144.3 0 bottom
R516  10K  [R0402]  123.95 115.37 0 top
R517  10K  [R0402]  123.95 114.02 0 top
R518  10K  [R0402]  123.95 112.66 0 top
R519  10K  [R0402]  123.95 120.62 0 top
R520  10K  [R0402]  123.95 119.26 0 top
R527  0 R0805  [R0805]  111.63 147.22 270 bottom
R528  10K  [R0402]  123.95 121.72 0 top
R529  0  [R0402]  131.06 146.97 90 bottom
R530  8.06K 1%  [R0402]  129.16 144.05 180 top
R531  0  [R0402]  131.83 141.38 270 top
R532  820  [R0402]  132.84 141.38 90 top
R533  47K  [R0402]  129.16 146.08 180 top
R534  47K  [R0402]  129.16 145.06 0 top
R535  0  [R0402]  125.22 167.92 0 bottom
R536  X_0  [R0402]  137.16 143.67 270 top
R537  0 R0805  [R0805]  137.67 148.11 90 bottom
R538  X_0  [R0402]  143.64 136.3 270 top
R539  0  [R0402]  141.22 135.41 0 top
R540  47K  [R0402]  137.54 140.11 270 bottom
R541  0  [R0402]  142.62 136.3 270 top
R542  0  [R0402]  144.4 130.33 90 top
R543  X_0  [R0402]  141.6 140.11 270 bottom
R544  X_0  [R0402]  140.59 140.11 270 bottom
R545  X_0  [R0402]  139.57 140.11 270 bottom
R546  100K  [R0402]  138.56 140.11 270 bottom
R547  2.7K 1%  [R0402]  131.44 131.09 270 bottom
R548  1M  [R0402]  132.72 126.01 90 bottom
R549  100K  [R0402]  134.87 139.6 0 bottom
R550  X_33  [R0402]  122.56 168.43 270 bottom
R551  33  [R0402]  123.7 168.43 270 bottom
R554  2.2K  [R0402]  129.16 146.08 0 bottom
R555  300  [R0402]  144.4 173.64 90 top
R556  4.7K  [R0402]  129.67 108.23 0 top
R557  300  [R0402]  145.92 173.64 90 top
R558  4.7K  [R0402]  142.62 107.73 90 top
R559  4.7K  [R0402]  141.35 142.52 0 top
R560  300  [R0402]  147.45 173.64 90 top
R561  300  [R0402]  147.7 139.48 90 top
R562  300  [R0402]  153.03 173.64 90 top
R563  300  [R0402]  151.51 173.64 90 top
R564  0  [R0402]  137.29 87.79 270 top
R565  0  [R0402]  136.21 87.79 270 top
R566  0  [R0402]  129.54 87.79 270 top
R567  0  [R0402]  128.52 87.79 270 top
R660  3.48K 1%  [R0402]  45.72 107.22 90 bottom
R661  18K  [R0402]  48.26 107.22 270 bottom
R662  11K 1%  [R0402]  44.58 107.22 270 bottom
R752  X_0  [R0402]  126.62 153.45 90 bottom
R755  4.7K  [R0402]  128.14 153.95 180 bottom
R756  300  [R0402]  103.12 105.69 270 bottom
R758  300  [R0402]  102.49 125 90 bottom
R759  4.7K  [R0402]  136.4 168.05 270 top
R760  4.7K  [R0402]  28.19 128.3 90 top
R761  X_0  [R0402]  28.19 130.21 270 top
R762  X_33  [R0402]  33.78 124.11 270 top
R763  10K  [R0402]  122.17 137.57 180 top
R764  2.2K  [R0402]  92.2 169.19 0 top
R765  2.2K  [R0402]  92.2 170.34 0 top
TDB_J8  ASP-125521-03  [QSH64_16_01]  132.5 173.64 270 bottom
TDB_J9  ASP-125521-03  [QSH64_16_01]  79.8 173.64 270 bottom
TDB_J10  ASP-125521-03  [QSH64_16_01]  29.07 173.64 270 bottom
TP1  -  [TESTPAD_C26]  73.91 81.06 180 bottom
TP2  TP  [TESTPAD_C26]  143.76 136.81 270 bottom
TP3  TP  [TESTPAD_C26]  140.97 126.65 270 bottom
TP4  TP  [TESTPAD_C26]  140.08 126.65 0 bottom
U1  SN74AVC16T245DGG-TSSOP48  [TSSOP48]  22.86 147.48 90 top
U2  SN74AVC16T245DGG-TSSOP48  [TSSOP48]  35.81 147.48 90 top
U3  SN74AVC4T245PWT-TSSOP16  [TSSOP16]  50.04 161.96 270 bottom
U4  SN74AVC4T245PWT-TSSOP16  [TSSOP16]  44.45 147.48 270 bottom
U5  SN74AVC8T245PW-TSSOP24  [TSSOP24]  37.72 135.03 270 top
U6  SN74AVC4T245PWT-TSSOP16  [TSSOP16]  50.04 147.48 270 bottom
U7  CDCV304-TSSOP8  [TSSOP8]  31.62 118.52 270 top
U8  SN74AVC4T245PWT-TSSOP16  [TSSOP16]  25.27 118.52 90 top
U9  D720101F1-FPGA144  [UPD720101]  32.77 100.87 270 top
U15  TPS54331D  [SOP8]  47.62 110.01 180 top
U17  AT24C02N-10SU-1.8-SOIC  [8P_SOP_150]  94.87 163.1 0 top
U20  CH7055A-BF-QFN40  [QFN40]  71.95 88.04 270 bottom
U21  RCLAMP0524J  [SLP2710P8]  64.14 76.87 270 bottom
U22  RCLAMP0524J  [SLP2710P8]  71.14 76.87 90 bottom
U23  74LVC1G17-SOT753  [SOT23_5]  60.65 90.71 270 bottom
U24  74LVC1G17-SOT753  [SOT23_5]  56.96 90.71 270 bottom
U25  KSZ8081MNXIA-QFN32  [QFN32]  87.59 133.25 90 top
U27  SPX1117M3-3.3  [SOT223]  84.2 96.3 90 top
U28  SPX1117M3-1.8  [SOT223]  59.82 103.28 90 top
U30  SN74AVC16T245DGG-TSSOP48  [TSSOP48]  68.96 163.86 90 top
U31  SN74AVC4T245PWT-TSSOP16  [TSSOP16]  88.9 163.1 270 top
U216  NUP4201MR6T1G-TSOP6  [SOT23-6]  43.8 84.61 270 bottom
U217  NUP4201MR6T1G-TSOP6  [SOT23-6]  23.36 84.61 270 bottom
U218  SN74AVC16T245DGG-TSSOP48  [TSSOP48]  136.14 113.95 90 top
U219  SN74AVC8T245PW-TSSOP24  [TSSOP24]  147.07 113.95 270 top
U220  SN74AVC4T245PWT-TSSOP16  [TSSOP16]  143.51 162.97 270 top
U221  SN74AVC4T245PWT-TSSOP16  [TSSOP16]  137.16 162.97 270 top
U223  SDIN5D2-4G-BGA169  [BGA169-EMMC]  115.57 148.11 0 top
U224  USB3318  [QFN24]  133.73 145.57 0 top
U225  FE2.1_LQFP48  [LQFP48-19P7]  137.8 133.38 270 bottom
U226  NUP4201MR6T1G-TSOP6  [SOT23-6]  132.84 84.99 180 top
U227  SPX1117M3-3.3  [SOT223]  153.16 131.48 90 top
U228  SPX1117M3-1.8  [SOT223]  153.16 123.86 90 top
U229  SPX1117M3-1.8  [SOT223]  42.42 123.35 90 top
U230  TXS0108EQPWRQ1-TSSOP20  [TSSOP20]  124.71 132.11 270 top
USB1  SUSB90LI7P  [USB_C]  139.7 77.75 0 top
USB2  SUSB90LI7P  [USB_C]  125.86 77.75 0 top
Y1  30MHz-SMD4P-5032-NP  [CRY200X128T40L4]  21.08 101.25 90 top
Y2  25MHz-SMD4P-5032-NP  [CRY200X128T40L4]  95.5 128.3 180 top
Y3  12MHz-SMD4P-3225-NP  [CRY3225SMD]  130.05 126.27 90 bottom
Y12  13MHz-SMD4P-5032-P3V3  [OSC5032]  128.02 152.05 270 top
Y106  33MHz-SMD4P-5032-P3V3  [OSC5032]  30.99 128.43 270 top

## Library data of the parts
C1-C12 C15 C18 C21-C26 C29 C30 C53-C60 C74 C75 C77 C78 C80 C81 C100 C101 C104 C105 C107 C108 C110 C111 C115 C119 C121-C123 C127 C134 C135 C165 C167-C182 C186-C191 C193 C195 C196 C198 C200 C201 C203 C206 C225 C227 C228 C405 C951-C953 = CAP_1
C13 C14 C16 C17 C19 C20 = CAP_1: signal model: CAP0827_C0402_10PF_10pF
C27 = CAP NP_2
C28 = CAP NP_2: User Part Number: HAMP; Tolerance: #TOL
C31 C623 C630 = CAPC,X5R,1206,16V,20%,10UF: tolerance: 20%
C32-C40 = CAP_2
C41 C42 C45 C49 C223 = CAP_B_0
C43 C44 C124 C125 C183 C208-C211 C214-C220 = CAP NP
C46 C48 C224 = CAPC,X7R,0603,50V,10%,470PF
C51 C52 C86 C89 C93 C98 C103 C106 C109 C114 C120 C126 C184 C185 = CAP_1: User Part Number: HAMP; Tolerance: #TOL
C73 C133 C161 C163 C226 C229 C622 C624-C626 C628 C631 = CAPC,X5R,0402,16V,10%,0_0.1uF: tolerance: 10%
C90 = C 0.1uF 25V 80-20% 0603 Z5U
C91 C92 C94-C97 = CAP0827
C99 C102 = CAP-NP
C162 C164 C230 C232 C629 = CAP NP: User Part Number: HAMP; Tolerance: #TOL
C194 C197 C199 C202 C204 C207 C212 C213 C221 = CAP_3: User Part Number: HAMP; Tolerance: #TOL
C205 C627 = CAPC,X5R,0402,10V,10%,0.1uF: tolerance: 10%
C222 = CAP_6: User Part Number: HAMP; Tolerance: #TOL
CE2 = CAPACITOR POL_0
CF1 = CF_CARD SOCKET_0
D3 D12-D14 = DIOD,SCH,B130-F,SMA,21V,1A
D4 D5 = DIODE_0
F1 F2 = SMD1812P150TF_24
F1V8 F3V3 F5V FLED1-FLED3 LED119-LED121 M1V8 M3V3 M5V MLED1-MLED3 P1V8 P3V3 P5V = LED GREEN 0805 SMT
FB1-FB3 FB32 FB33 = FER,EMI,1206,3A,25%,50OHM100MHZ
FB4 FB5 FB15 FB16 = FB_0603: User Part Number: HAMP; Tolerance: #TOL
FB6-FB8 = FB_0603: User Part Number: HAMP; Tolerance: #TOL; signal model: BK1608HS470-T_L0603_75_OHM@100M_75_Ohm@100MHz
FB9-FB11 = BK1608HS470-T: User Part Number: HAMP; Tolerance: #TOL; signal model: BK1608HS470-T_L0603_75_OHM@100M_75_Ohm@100MHz
FB12-FB14 = BTKXNS_0: User Part Number: HAMP; Tolerance: #TOL
H1-H3 = Mounting Hole_4
J1 J11 J15 = CN 1X4 HEADER
J5 J9 J16 = CN 2X12 LCD P2.0mm
J6 = SPI FLASH SOCKET
J7 J8 = CN 2X5 HEADER P2.5mm
J12 J13 = CN 1X3 HEADER P2.5mm
J14 = TF CARD_1
J18 = HR911105A_1
J_KBMS1 = CN Mini-DIN 17P
JUSB1 JUSB2 = USB_TH_2X
JVGA1 = DB15_0
L2 = INDCT,PWR,063T,5.5A,4.7uH
LED118 = LED
M7-M18 = MARK: User Part Number: HAMP; Tolerance: #TOL
M* NOREF#3 NOREF#4 NOREF#6 NOREF#10 NOREF#13-NOREF#15 = -: Tolerance: #TOL; User Part Number: HAMP
MS1-MS4 = MTG-HOLE-8_1
NOREF#5 NOREF#7-NOREF#9 NOREF#11 = -: User Part Number: HAMP; Tolerance: #TOL
PCI1 = PCI-32AB_4
Q1-Q5 Q16 = SN74AVC1T45_0
Q7-Q15 = MOS N_1: User Part Number: HAMP; Tolerance: #TOL
R1-R15 R70-R73 R81-R83 R125 R197 R200 R202 R207-R211 R321-R338 R357-R364 R396-R398 R400 R402 R404 R405 R407 R408 R410 R411 R413 R414 R418 R420 R422 R424-R426 R435-R449 R452 R453 R455 R457-R459 R464-R469 R472-R475 R505-R514 R529-R534 R536 R538 R539 R541-R545 R549 R554-R563 R752 R755 R760 R761 = RES_0: User Part Number: HAMP; Tolerance: #TOL
R16-R20 R762 = RESISTOR_3: User Part Number: HAMP; Tolerance: #TOL
R21-R28 R36-R39 R43-R47 R339 R340 R344 R346 R347 R377-R381 R385 R415 R432 R461 R462 R548 R756 R758 = R: User Part Number: HAMP; Tolerance: #TOL
R29-R32 R48-R68 = R_8: User Part Number: HAMP; Tolerance: #TOL
R33 = R_8: User Part Number: HAMP; Tolerance: #TOL; signal model: RC0603FR-0775RL_R0402_75_75
R34 R35 = R: User Part Number: HAMP; Tolerance: #TOL; signal model: RC0603FR-0775RL_R0402_75_75
R40-R42 R383 R387 R470 R471 R476 R516-R520 R528 R763 = RC0402JR-070RL_0: User Part Number: HAMP; Tolerance: #TOL
R69 R433 R450 R477-R484 R487 R759 = RC0402JR-070RL_2: User Part Number: HAMP; Tolerance: #TOL
R77 = R0603: User Part Number: HAMP; Tolerance: #TOL
R78 = RESD,0603,5%,1/16W,0: User Part Number: A93552-004; Tolerance: 1%; tolerance: 1%
R201 = RES_0: User Part Number: HAMP; Tolerance: 1%
R203 = RES_0: User Part Number: HAMP; Tolerance: 5%
R341 R343 R345 R460 R764 R765 = R 100K 5% 1/16W 0603: User Part Number: HAMP; Tolerance: #TOL
R348-R356 = R 3K 5% 1/16W 0603: User Part Number: HAMP; Tolerance: #TOL
R365 R366 R463 = RC0603FR-0775RL: User Part Number: HAMP; Tolerance: #TOL; signal model: RC0603FR-0775RL_R0402_33_33
R367-R375 = RC0603FR-0775RL: User Part Number: HAMP; Tolerance: #TOL
R376 R382 R384 R386 = R_2: User Part Number: HAMP; Tolerance: #TOL
R416 = R 300K 5% 1/16W 0603: User Part Number: HAMP; Tolerance: #TOL
R421 R423 = RES_0: User Part Number: HAMP; Tolerance: #TOL; signal model: RES_0_R0402_33_33
R515 R527 R537 = R 100K 5% 1/16W 0603
R535 = RES_0: User Part Number: HAMP; Tolerance: #TOL; signal model: RES_0_R0402_0_0
R540 R546 R547 = RC0603FR-071KL: User Part Number: HAMP; Tolerance: #TOL
R550 = RC0402JR-070RL_2: User Part Number: HAMP; Tolerance: #TOL; signal model: RC0402JR-070RL_2_R0402_X_33_X_33
R551 = RC0402JR-070RL_2: User Part Number: HAMP; Tolerance: #TOL; signal model: RC0402JR-070RL_2_R0402_33_33
R564-R567 = RC0603FR-071KL: User Part Number: HAMP; Tolerance: #TOL; signal model: RC0603FR-071KL_R0402_0_0
R660 = RESD,0603,5%,1/16W,0: User Part Number: A93552-004; Tolerance: 5%; tolerance: 5%
R661 = RESD,0603,5%,1/16W,0: User Part Number: HAMP; Tolerance: 5%; tolerance: 5%
R662 = RESD,0603,5%,1/16W,0: User Part Number: HAMP; Tolerance: 1%; tolerance: 1%
TDB_J8-TDB_J10 = QTE-060-02-F-D-A_1
TP1 = CON1,TP,SMT,TestPad_C26
TP2-TP4 = TP_0
U1 U2 U30 = 74ALVC164245_4
U3 U4 U6 U8 U31 U220 U221 = 74AVC4T245_0: Tolerance: ***; User Part Number: ***
U5 U219 = 74AVC8T245_0
U7 = PCI BUFF: signal model: RCLAMP0524_0_SLP2710P8_X_RCLAMP_X_RCLAMP0524
U9 = D720101GJ_0
U15 = TPS54331
U17 = IC EEPROM AT24C02N-10SC-2_0.7
U20 = ADV7125_2
U21 U22 = RCLAMP0524_0
U23 U24 = SN74HC1G14_0
U25 = ks8721_3
U27 U28 U227-U229 = U_LM1117MPX-3.3V
U216 U217 U226 = CM1293A
U218 = 74ALVC164245_0
U223 = U_SDIN4C2-8G_2
U224 = USB3300_0
U225 = JM20329_LQFP48_4
U230 = TXS0108E_0: Tolerance: ***; User Part Number: ***
USB1 USB2 = 8 HEADER_2
Y1-Y3 = CRYSTAL_0
Y12 Y106 = OSC3V3

## Footprints (pads in the part's own frame, mm; a bottom-side part is the same pattern mirrored in y, then rotated)
2X5_2MM
  rect 1.397x1.397 hole 0.889: 1(-1.001,4)
  round 1.27 hole 0.889: 2(1.001,4) 3(-1.001,1.999) 4(1.001,1.999) 5(-1.001,0) 6(1.001,0) 7(-1.001,-1.999) 8(1.001,-1.999) 9(-1.001,-4) 10(1.001,-4)
2X12_P2MM
  rect 1.397x1.397 hole 0.889: 1(-1,11)
  round 1.27 hole 0.889: 2(1,11) 3(-1,9) 4(1,9) 5(-1,7) 6(1,7) 7(-1,5) 8(1,5) 9(-1,3) 10(1,3) 11(-1,1) 12(1,1) 13(-1,-1) 14(1,-1) 15(-1,-3) 16(1,-3) 17(-1,-5) 18(1,-5) 19(-1,-7) 20(1,-7) 21(-1,-9) 22(1,-9) 23(-1,-11) 24(1,-11)
8P_SOP_150
  rect 0.61x1.524 smd: 1(-1.905,-2.731) 2(-0.635,-2.731) 3(0.635,-2.731) 4(1.905,-2.731) 5(1.905,2.731) 6(0.635,2.731) 7(-0.635,2.731) 8(-1.905,2.731)
1206-A
  rect 1.27x1.651 smd: 1(-1.6,0) 2(1.6,0)
1210-A
  rect 1.524x2.667 smd: 1(-1.501,0) 2(1.501,0)
BCAP
  rect 1.524x2.286 smd: 1(0,0) 2(3,0)
BGA169-EMMC
  round 0.305 smd: A4(-1.75,6.751) A6(-0.749,6.751) A9(0.749,6.751) A11(1.75,6.751) AA1(-3.251,-3.251) AA2(-2.751,-3.251) AA3(-2.25,-3.251) AA4(-1.75,-3.251) AA5(-1.25,-3.251) AA6(-0.749,-3.251) AA7(-0.249,-3.251) AA8(0.249,-3.251) AA9(0.749,-3.251) AA10(1.25,-3.251) AA11(1.75,-3.251) AA12(2.25,-3.251) AA13(2.751,-3.251) AA14(3.251,-3.251) AE1(-3.251,-5.25) AE14(3.251,-5.25) AG2(-2.751,-6.251) AG13(2.751,-6.251) AH4(-1.75,-6.751) AH6(-0.749,-6.751) AH9(0.749,-6.751) AH11(1.75,-6.751) B2(-2.751,6.251) B13(2.751,6.251) D1(-3.251,5.25) D14(3.251,5.25) H1(-3.251,3.251) H3(-2.25,3.251) H4(-1.75,3.251) H5(-1.25,3.251) H7(-0.249,3.251) H8(0.249,3.251) H9(0.749,3.251) H10(1.25,3.251) H11(1.75,3.251) H12(2.25,3.251) H13(2.751,3.251) H14(3.251,3.251) J2(-2.751,2.751) J3(-2.25,2.751) J4(-1.75,2.751) J5(-1.25,2.751) J6(-0.749,2.751) J7(-0.249,2.751) J8(0.249,2.751) J9(0.749,2.751) J10(1.25,2.751) J11(1.75,2.751) J12(2.25,2.751) J13(2.751,2.751) J14(3.251,2.751) K1(-3.251,2.25) K2(-2.751,2.25) K3(-2.25,2.25) K4(-1.75,2.25) K6(-0.749,2.25) K7(-0.249,2.25) K8(0.249,2.25) K9(0.749,2.25) K10(1.25,2.25) K11(1.75,2.25) K12(2.25,2.25) K13(2.751,2.25) K14(3.251,2.25) L1(-3.251,1.75) L2(-2.751,1.75) L3(-2.25,1.75) L12(2.25,1.75) L13(2.751,1.75) L14(3.251,1.75) M1(-3.251,1.25) M2(-2.751,1.25) M3(-2.25,1.25) M5(-1.25,1.25) M6(-0.749,1.25) M7(-0.249,1.25) M8(0.249,1.25) M9(0.749,1.25) M10(1.25,1.25) M12(2.25,1.25) M13(2.751,1.25) M14(3.251,1.25) N1(-3.251,0.749) N2(-2.751,0.749) N3(-2.25,0.749) N5(-1.25,0.749) N10(1.25,0.749) N12(2.25,0.749) N13(2.751,0.749) N14(3.251,0.749) P1(-3.251,0.249) P2(-2.751,0.249) P3(-2.25,0.249) P5(-1.25,0.249) P10(1.25,0.249) P12(2.25,0.249) P13(2.751,0.249) P14(3.251,0.249) R1(-3.251,-0.249) R2(-2.751,-0.249) R3(-2.25,-0.249) R5(-1.25,-0.249) R10(1.25,-0.249) R12(2.25,-0.249) R13(2.751,-0.249) R14(3.251,-0.249) T1(-3.251,-0.749) T2(-2.751,-0.749) T3(-2.25,-0.749) T5(-1.25,-0.749) T10(1.25,-0.749) T12(2.25,-0.749) T13(2.751,-0.749) T14(3.251,-0.749) U1(-3.251,-1.25) U2(-2.751,-1.25) U3(-2.25,-1.25) U5(-1.25,-1.25) U6(-0.749,-1.25) U7(-0.249,-1.25) U8(0.249,-1.25) U9(0.749,-1.25) U10(1.25,-1.25) U12(2.25,-1.25) U13(2.751,-1.25) U14(3.251,-1.25) V1(-3.251,-1.75) V2(-2.751,-1.75) V3(-2.25,-1.75) V12(2.25,-1.75) V13(2.751,-1.75) V14(3.251,-1.75) W1(-3.251,-2.25) W2(-2.751,-2.25) W3(-2.25,-2.25) W4(-1.75,-2.25) W5(-1.25,-2.25) W6(-0.749,-2.25) W7(-0.249,-2.25) W8(0.249,-2.25) W9(0.749,-2.25) W10(1.25,-2.25) W11(1.75,-2.25) W12(2.25,-2.25) W13(2.751,-2.25) W14(3.251,-2.25) Y2(-2.751,-2.751) Y3(-2.25,-2.751) Y4(-1.75,-2.751) Y5(-1.25,-2.751) Y6(-0.749,-2.751) Y7(-0.249,-2.751) Y8(0.249,-2.751) Y9(0.749,-2.751) Y10(1.25,-2.751) Y11(1.75,-2.751) Y12(2.25,-2.751) Y13(2.751,-2.751) Y14(3.251,-2.751)
C0402
  custom 0.549x0.599 smd: 1(-0.475,0) 2(0.475,0)
C0603
  oval 0.909x0.759 smd: 1(-0.691,0) 2(0.691,0)
C0805
  oval 1.021x1.27 smd: 1(-0.889,0) 2(0.889,0)
CFCMD_7E50_3M
  round 1.727 hole 1.727 unplated: (-20.079,-5.791) (20.079,-5.791)
  oval 0.406x3.505 smd: 1(-15.56,0) 2(-14.29,0) 3(-13.02,0) 4(-11.75,0) 5(-10.48,0) 6(-9.21,0) 7(-7.94,0) 8(-6.67,0) 9(-5.4,0) 10(-4.13,0) 11(-2.86,0) 12(-1.59,0) 13(-0.32,0) 14(0.95,0) 15(2.22,0) 16(3.49,0) 17(4.76,0) 18(6.03,0) 19(7.3,0) 20(8.57,0) 21(9.84,0) 22(11.11,0) 23(12.38,0) 24(13.65,0) 25(14.92,0) 26(-14.92,0) 27(-13.65,0) 28(-12.38,0) 29(-11.11,0) 30(-9.84,0) 31(-8.57,0) 32(-7.3,0) 33(-6.03,0) 34(-4.76,0) 35(-3.49,0) 36(-2.22,0) 37(-0.95,0) 38(0.32,0) 39(1.59,0) 40(2.86,0) 41(4.13,0) 42(5.4,0) 43(6.67,0) 44(7.94,0) 45(9.21,0) 46(10.48,0) 47(11.75,0) 48(13.02,0) 49(14.29,0) 50(15.56,0)
  rect 3.048x5.08 smd: 55(-23.825,-10.363) 56(23.825,-10.363)
CRY200X128T40L4
  rect 1.626x1.321 smd: 1(-1.93,-1.168) 2(1.93,-1.168) 3(1.93,1.168) 4(-1.93,1.168)
CRY3225SMD
  rect 1.4x1.199 smd: 1(-1.1,-0.851) 2(1.1,-0.851) 3(1.1,0.851) 4(-1.1,0.851)
D67X49H50
  rect 0.635x0.838 smd: A(-1.118,0) C(1.118,0)
DCAP
  rect 2.159x2.743 smd: 1(3.15,0) 2(-3.15,0)
DCK_6P
  rect 1.27x0.3 smd: 1(0,0) 2(0,-0.65) 3(0,-1.3) 4(2.54,-1.3) 5(2.54,-0.65) 6(2.54,0)
DIP_FLASH_NARROWSOCKET
  round 1.4 hole 0.889: (-3.81,0) (3.81,0) 2(-3.81,7.62) 3(-3.81,5.08) 4(-3.81,2.54) 5(-3.81,-2.54) 6(-3.81,-5.08) 7(-3.81,-7.62) 8(-3.81,-10.16) 9(3.81,-10.16) 10(3.81,-7.62) 11(3.81,-5.08) 12(3.81,-2.54) 13(3.81,2.54) 14(3.81,5.08) 15(3.81,7.62) 16(3.81,10.16)
  rect 1.4x1.4 hole 0.889: 1(-3.81,10.16)
J1X3L100P
  rect 1.6x1.6 hole 1.049: 1(0,0)
  round 1.6 hole 1.049: 2(2.54,0) 3(5.08,0)
L0603
  oval 0.909x0.759 smd: 1(-0.691,0) 2(0.691,0)
L0805
  oval 1.021x1.27 smd: 1(-0.889,0) 2(0.889,0)
LED0603
  rect 0.889x0.889 smd: 1(-0.8,0) 2(0.8,0)
LQFP48-19P7
  oval 0.279x1.626 smd: 1(-2.751,-4.201) 2(-2.25,-4.201) 3(-1.75,-4.201) 4(-1.25,-4.201) 5(-0.749,-4.201) 6(-0.249,-4.201) 7(0.249,-4.201) 8(0.749,-4.201) 9(1.25,-4.201) 10(1.75,-4.201) 11(2.25,-4.201) 12(2.751,-4.201) 25(2.751,4.201) 26(2.25,4.201) 27(1.75,4.201) 28(1.25,4.201) 29(0.749,4.201) 30(0.249,4.201) 31(-0.249,4.201) 32(-0.749,4.201) 33(-1.25,4.201) 34(-1.75,4.201) 35(-2.25,4.201) 36(-2.751,4.201)
  oval 1.626x0.279 smd: 13(4.201,-2.751) 14(4.201,-2.25) 15(4.201,-1.75) 16(4.201,-1.25) 17(4.201,-0.749) 18(4.201,-0.249) 19(4.201,0.249) 20(4.201,0.749) 21(4.201,1.25) 22(4.201,1.75) 23(4.201,2.25) 24(4.201,2.751) 37(-4.201,2.751) 38(-4.201,2.25) 39(-4.201,1.75) 40(-4.201,1.25) 41(-4.201,0.749) 42(-4.201,0.249) 43(-4.201,-0.249) 44(-4.201,-0.749) 45(-4.201,-1.25) 46(-4.201,-1.75) 47(-4.201,-2.25) 48(-4.201,-2.751)
OSC5032
  rect 1.626x1.321 smd: 1(-1.93,-1.168) 2(1.93,-1.168) 3(1.93,1.168) 4(-1.93,1.168)
PCI_AB
  round 2.438 hole 2.438 unplated: (-1.905,-3.81) (62.865,-3.81)
  round 1.27 hole 0.94: A1(0,0) A2(1.27,-2.54) A3(2.54,0) A4(3.81,-2.54) A5(5.08,0) A6(6.35,-2.54) A7(7.62,0) A8(8.89,-2.54) A9(10.16,0) A10(11.43,-2.54) A11(12.7,0) A12(13.97,-2.54) A13(15.24,0) A14(16.51,-2.54) A15(17.78,0) A16(19.05,-2.54) A17(20.32,0) A18(21.59,-2.54) A19(22.86,0) A20(24.13,-2.54) A21(25.4,0) A22(26.67,-2.54) A23(27.94,0) A24(29.21,-2.54) A25(30.48,0) A26(31.75,-2.54) A27(33.02,0) A28(34.29,-2.54) A29(35.56,0) A30(36.83,-2.54) A31(38.1,0) A32(39.37,-2.54) A33(40.64,0) A34(41.91,-2.54) A35(43.18,0) A36(44.45,-2.54) A37(45.72,0) A38(46.99,-2.54) A39(48.26,0) A40(49.53,-2.54) A41(50.8,0) A42(52.07,-2.54) A43(53.34,0) A44(54.61,-2.54) A45(55.88,0) A46(57.15,-2.54) A47(58.42,0) A48(59.69,-2.54) A49(60.96,0) A52(64.77,-2.54) A53(66.04,0) A54(67.31,-2.54) A55(68.58,0) A56(69.85,-2.54) A57(71.12,0) A58(72.39,-2.54) A59(73.66,0) A60(74.93,-2.54) A61(76.2,0) A62(77.47,-2.54) B1(0,-5.08) B2(1.27,-7.62) B3(2.54,-5.08) B4(3.81,-7.62) B5(5.08,-5.08) B6(6.35,-7.62) B7(7.62,-5.08) B8(8.89,-7.62) B9(10.16,-5.08) B10(11.43,-7.62) B11(12.7,-5.08) B12(13.97,-7.62) B13(15.24,-5.08) B14(16.51,-7.62) B15(17.78,-5.08) B16(19.05,-7.62) B17(20.32,-5.08) B18(21.59,-7.62) B19(22.86,-5.08) B20(24.13,-7.62) B21(25.4,-5.08) B22(26.67,-7.62) B23(27.94,-5.08) B24(29.21,-7.62) B25(30.48,-5.08) B26(31.75,-7.62) B27(33.02,-5.08) B28(34.29,-7.62) B29(35.56,-5.08) B30(36.83,-7.62) B31(38.1,-5.08) B32(39.37,-7.62) B33(40.64,-5.08) B34(41.91,-7.62) B35(43.18,-5.08) B36(44.45,-7.62) B37(45.72,-5.08) B38(46.99,-7.62) B39(48.26,-5.08) B40(49.53,-7.62) B41(50.8,-5.08) B42(52.07,-7.62) B43(53.34,-5.08) B44(54.61,-7.62) B45(55.88,-5.08) B46(57.15,-7.62) B47(58.42,-5.08) B48(59.69,-7.62) B49(60.96,-5.08) B52(64.77,-7.62) B53(66.04,-5.08) B54(67.31,-7.62) B55(68.58,-5.08) B56(69.85,-7.62) B57(71.12,-5.08) B58(72.39,-7.62) B59(73.66,-5.08) B60(74.93,-7.62) B61(76.2,-5.08) B62(77.47,-7.62)
PS2_X
  rect 1.27x1.27 hole 0.94: 1(0,0)
  round 1.346 hole 0.94: 2(0,-2.591) 3(0,2.108) 4(0,-4.699) 5(-2.489,2.108) 6(-2.489,-4.699) 7(-7.061,0) 8(-7.061,-2.591) 9(-7.061,2.108) 10(-7.061,-4.699) 11(-9.55,2.108) 12(-9.55,-4.699)
  round 3.175 hole 2.54: 13(-7.188,5.512) 14(-7.188,-8.103) 15(3.023,5.486) 16(3.023,-8.09) 17(3.81,-1.295)
QFN24
  oval 0.254x0.813 smd: 1(-1.25,-1.999) 2(-0.749,-1.999) 3(-0.249,-1.999) 4(0.249,-1.999) 5(0.749,-1.999) 6(1.25,-1.999) 13(1.25,1.999) 14(0.749,1.999) 15(0.249,1.999) 16(-0.249,1.999) 17(-0.749,1.999) 18(-1.25,1.999)
  oval 0.813x0.254 smd: 7(1.999,-1.25) 8(1.999,-0.749) 9(1.999,-0.249) 10(1.999,0.249) 11(1.999,0.749) 12(1.999,1.25) 19(-1.999,1.25) 20(-1.999,0.749) 21(-1.999,0.249) 22(-1.999,-0.249) 23(-1.999,-0.749) 24(-1.999,-1.25)
  rect 2.261x2.261 smd: 25(0,0)
QFN32
  oval 0.899x0.279 smd: 1(-2.55,1.75) 2(-2.55,1.25) 3(-2.55,0.749) 4(-2.55,0.249) 5(-2.55,-0.249) 6(-2.55,-0.749) 7(-2.55,-1.25) 8(-2.55,-1.75) 17(2.55,-1.75) 18(2.55,-1.25) 19(2.55,-0.749) 20(2.55,-0.249) 21(2.55,0.249) 22(2.55,0.749) 23(2.55,1.25) 24(2.55,1.75)
  oval 0.279x0.899 smd: 9(-1.75,-2.55) 10(-1.25,-2.55) 11(-0.749,-2.55) 12(-0.249,-2.55) 13(0.249,-2.55) 14(0.749,-2.55) 15(1.25,-2.55) 16(1.75,-2.55) 25(1.75,2.55) 26(1.25,2.55) 27(0.749,2.55) 28(0.249,2.55) 29(-0.249,2.55) 30(-0.749,2.55) 31(-1.25,2.55) 32(-1.75,2.55)
  rect 3.599x3.599 smd: 33(0,0)
QFN40
  oval 0.914x0.229 smd: 1(-2.55,1.801) 2(-2.55,1.4) 3(-2.55,1.001) 4(-2.55,0.599) 5(-2.55,0.201) 6(-2.55,-0.201) 7(-2.55,-0.599) 8(-2.55,-1.001) 9(-2.55,-1.4) 10(-2.55,-1.801) 21(2.55,-1.801) 22(2.55,-1.4) 23(2.55,-1.001) 24(2.55,-0.599) 25(2.55,-0.201) 26(2.55,0.201) 27(2.55,0.599) 28(2.55,1.001) 29(2.55,1.4) 30(2.55,1.801)
  oval 0.229x0.914 smd: 11(-1.801,-2.55) 12(-1.4,-2.55) 13(-1.001,-2.55) 14(-0.599,-2.55) 15(-0.201,-2.55) 16(0.201,-2.55) 17(0.599,-2.55) 18(1.001,-2.55) 19(1.4,-2.55) 20(1.801,-2.55) 31(1.801,2.55) 32(1.4,2.55) 33(1.001,2.55) 34(0.599,2.55) 35(0.201,2.55) 36(-0.201,2.55) 37(-0.599,2.55) 38(-1.001,2.55) 39(-1.4,2.55) 40(-1.801,2.55)
  custom 3.175x3.175 smd: 41(0,0)
QSH64_16_01
  round 1.016 hole 1.016 unplated: (2.667,-20.046) (2.667,20.046)
  rect 1.854x0.279 smd: 1(-2.865,17.252) 2(2.865,17.252) 3(-2.865,16.754) 4(2.865,16.754) 5(-2.865,16.251) 6(2.865,16.251) 7(-2.865,15.753) 8(2.865,15.753) 9(-2.865,15.25) 10(2.865,15.25) 11(-2.865,14.752) 12(2.865,14.752) 13(-2.865,14.249) 14(2.865,14.249) 15(-2.865,13.752) 16(2.865,13.752) 17(-2.865,13.249) 18(2.865,13.249) 19(-2.865,12.751) 20(2.865,12.751) 21(-2.865,12.248) 22(2.865,12.248) 23(-2.865,11.75) 24(2.865,11.75) 25(-2.865,11.247) 26(2.865,11.247) 27(-2.865,10.749) 28(2.865,10.749) 29(-2.865,10.246) 30(2.865,10.246) 31(-2.865,9.749) 32(2.865,9.749) 33(-2.865,9.246) 34(2.865,9.246) 35(-2.865,8.748) 36(2.865,8.748) 37(-2.865,8.245) 38(2.865,8.245) 39(-2.865,7.747) 40(2.865,7.747) 41(-2.865,7.244) 42(2.865,7.244) 43(-2.865,6.746) 44(2.865,6.746) 45(-2.865,6.243) 46(2.865,6.243) 47(-2.865,5.745) 48(2.865,5.745) 49(-2.865,5.243) 50(2.865,5.243) 51(-2.865,4.745) 52(2.865,4.745) 53(-2.865,4.242) 54(2.865,4.242) 55(-2.865,3.744) 56(2.865,3.744) 57(-2.865,3.241) 58(2.865,3.241) 59(-2.865,2.743) 60(2.865,2.743) 61(-2.865,-2.748) 62(2.865,-2.748) 63(-2.865,-3.251) 64(2.865,-3.251) 65(-2.865,-3.749) 66(2.865,-3.749) 67(-2.865,-4.252) 68(2.865,-4.252) 69(-2.865,-4.75) 70(2.865,-4.75) 71(-2.865,-5.253) 72(2.865,-5.253) 73(-2.865,-5.751) 74(2.865,-5.751) 75(-2.865,-6.253) 76(2.865,-6.253) 77(-2.865,-6.751) 78(2.865,-6.751) 79(-2.865,-7.254) 80(2.865,-7.254) 81(-2.865,-7.752) 82(2.865,-7.752) 83(-2.865,-8.255) 84(2.865,-8.255) 85(-2.865,-8.753) 86(2.865,-8.753) 87(-2.865,-9.256) 88(2.865,-9.256) 89(-2.865,-9.754) 90(2.865,-9.754) 91(-2.865,-10.257) 92(2.865,-10.257) 93(-2.865,-10.754) 94(2.865,-10.754) 95(-2.865,-11.257) 96(2.865,-11.257) 97(-2.865,-11.755) 98(2.865,-11.755) 99(-2.865,-12.258) 100(2.865,-12.258) 101(-2.865,-12.756) 102(2.865,-12.756) 103(-2.865,-13.259) 104(2.865,-13.259) 105(-2.865,-13.757) 106(2.865,-13.757) 107(-2.865,-14.26) 108(2.865,-14.26) 109(-2.865,-14.757) 110(2.865,-14.757) 111(-2.865,-15.26) 112(2.865,-15.26) 113(-2.865,-15.758) 114(2.865,-15.758) 115(-2.865,-16.261) 116(2.865,-16.261) 117(-2.865,-16.759) 118(2.865,-16.759) 119(-2.865,-17.262) 120(2.865,-17.262) H1(2.865,17.734) H2(-2.865,17.734) H3(2.865,2.24) H4(-2.865,2.24) H5(2.865,-2.25) H6(-2.865,-2.25) H7(2.865,-17.76) H8(-2.865,-17.76)
  rect 0.406x2.54 smd: 121(0,18.064) 124(0,1.935) 125(0,-1.935) 128(0,-18.064)
  rect 0.406x4.699 smd: 122(0,13.178) 123(0,6.828) 126(0,-6.828) 127(0,-13.178)
